# EAGLE board Buck_Regulator_AP3429A_1V8-Panel (EAGLE 9.6.2), part 1 of 6
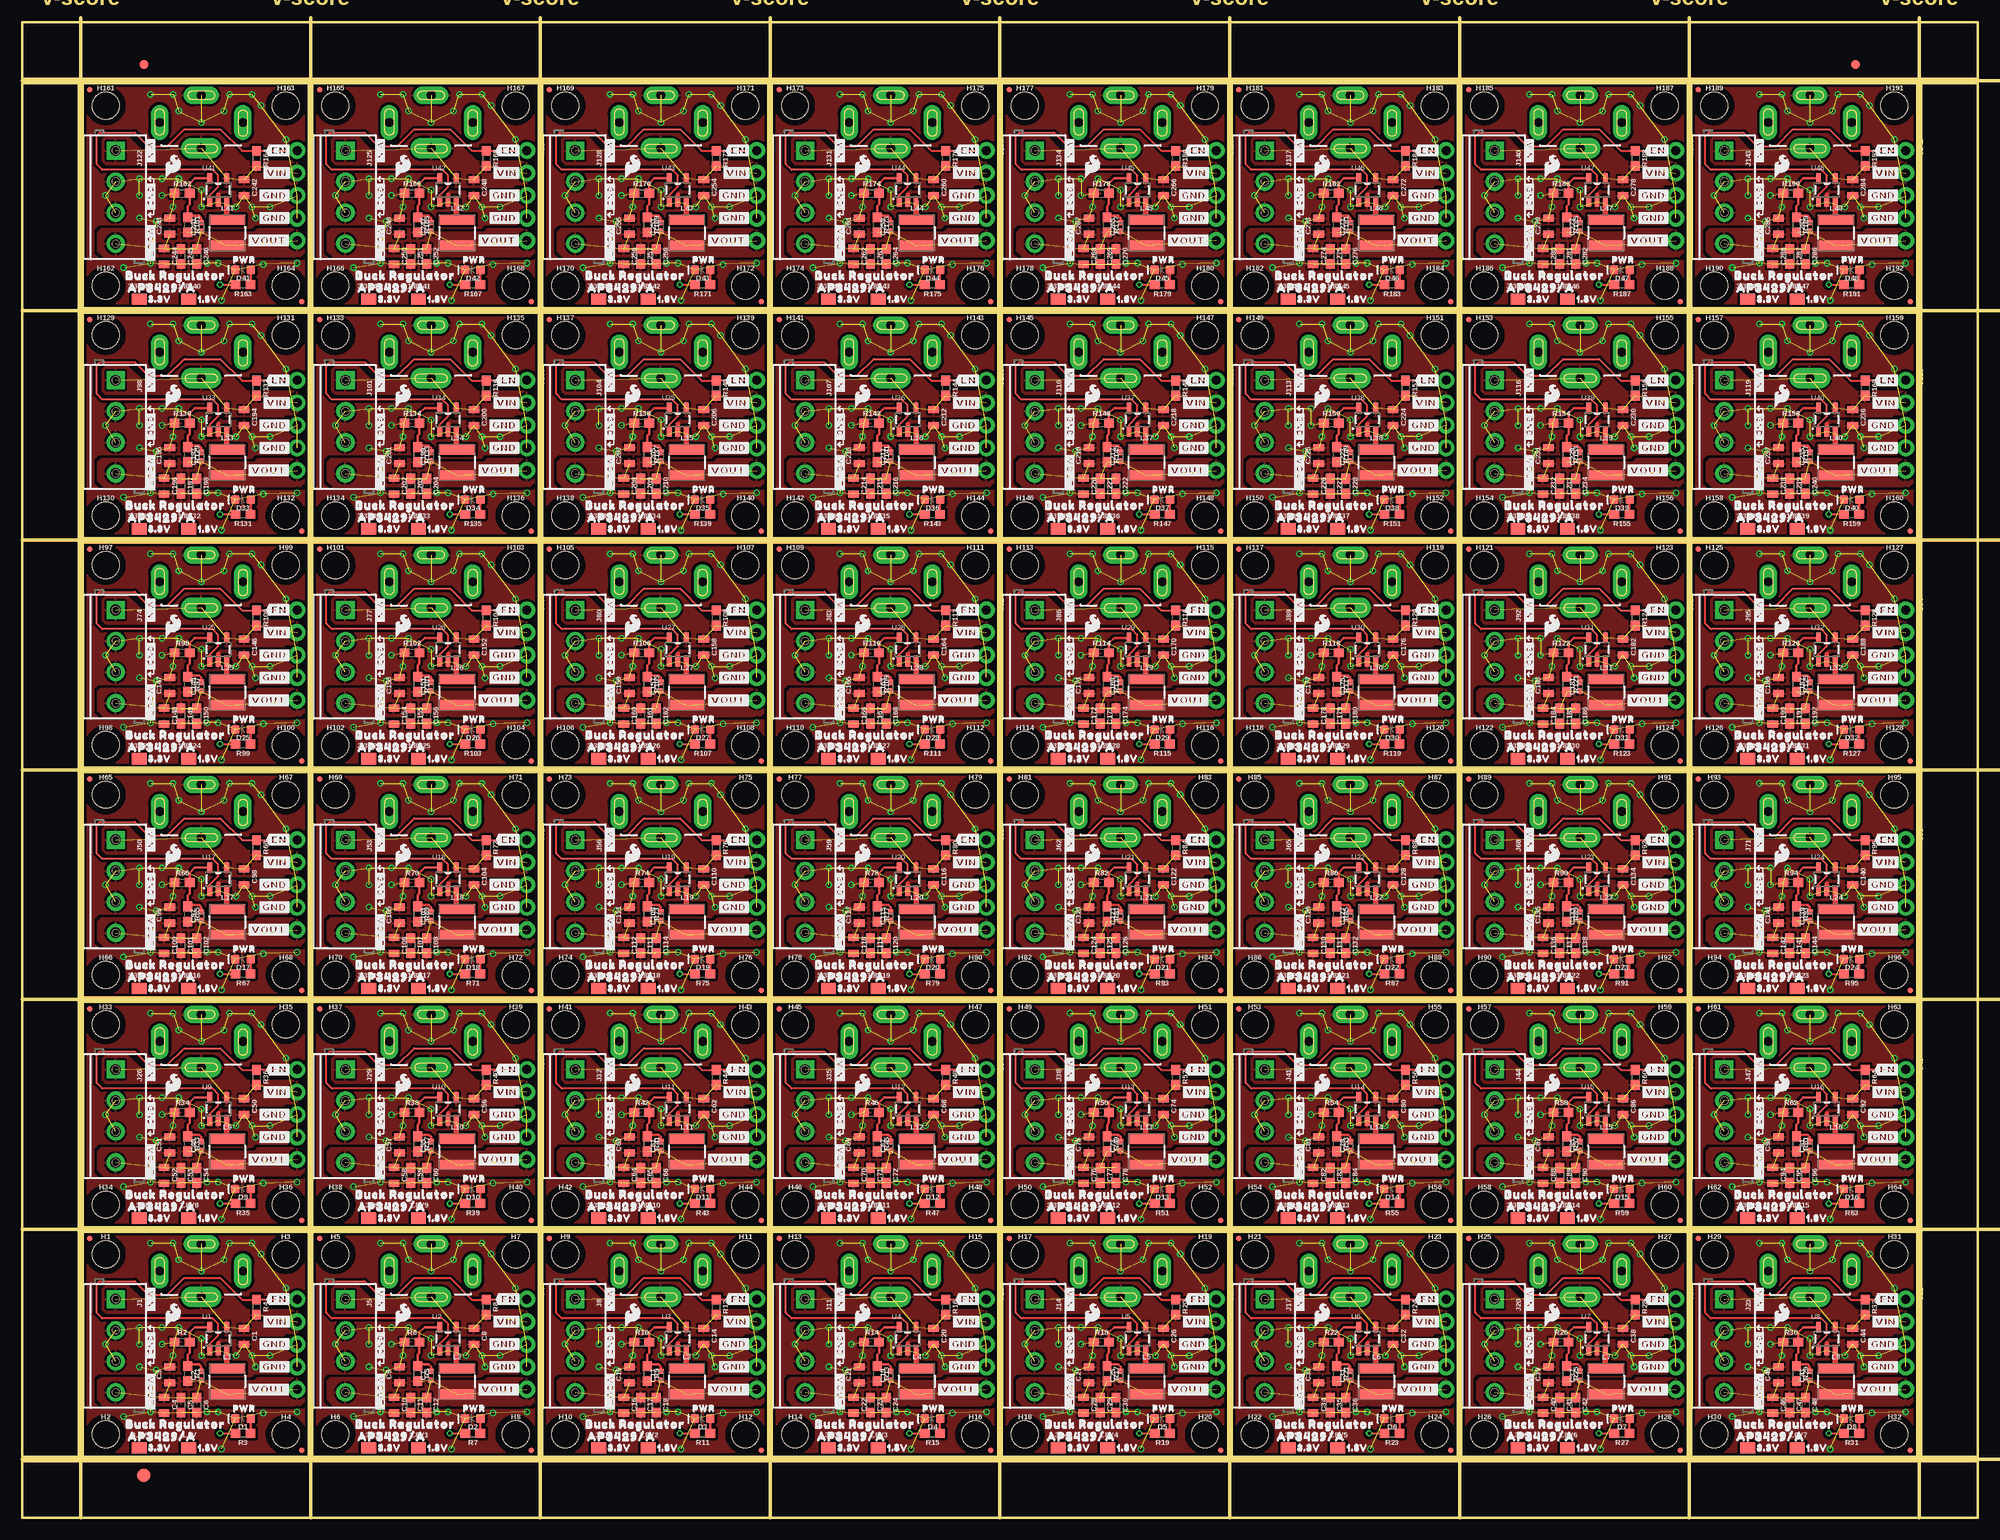
[diagram p0: board, top side]
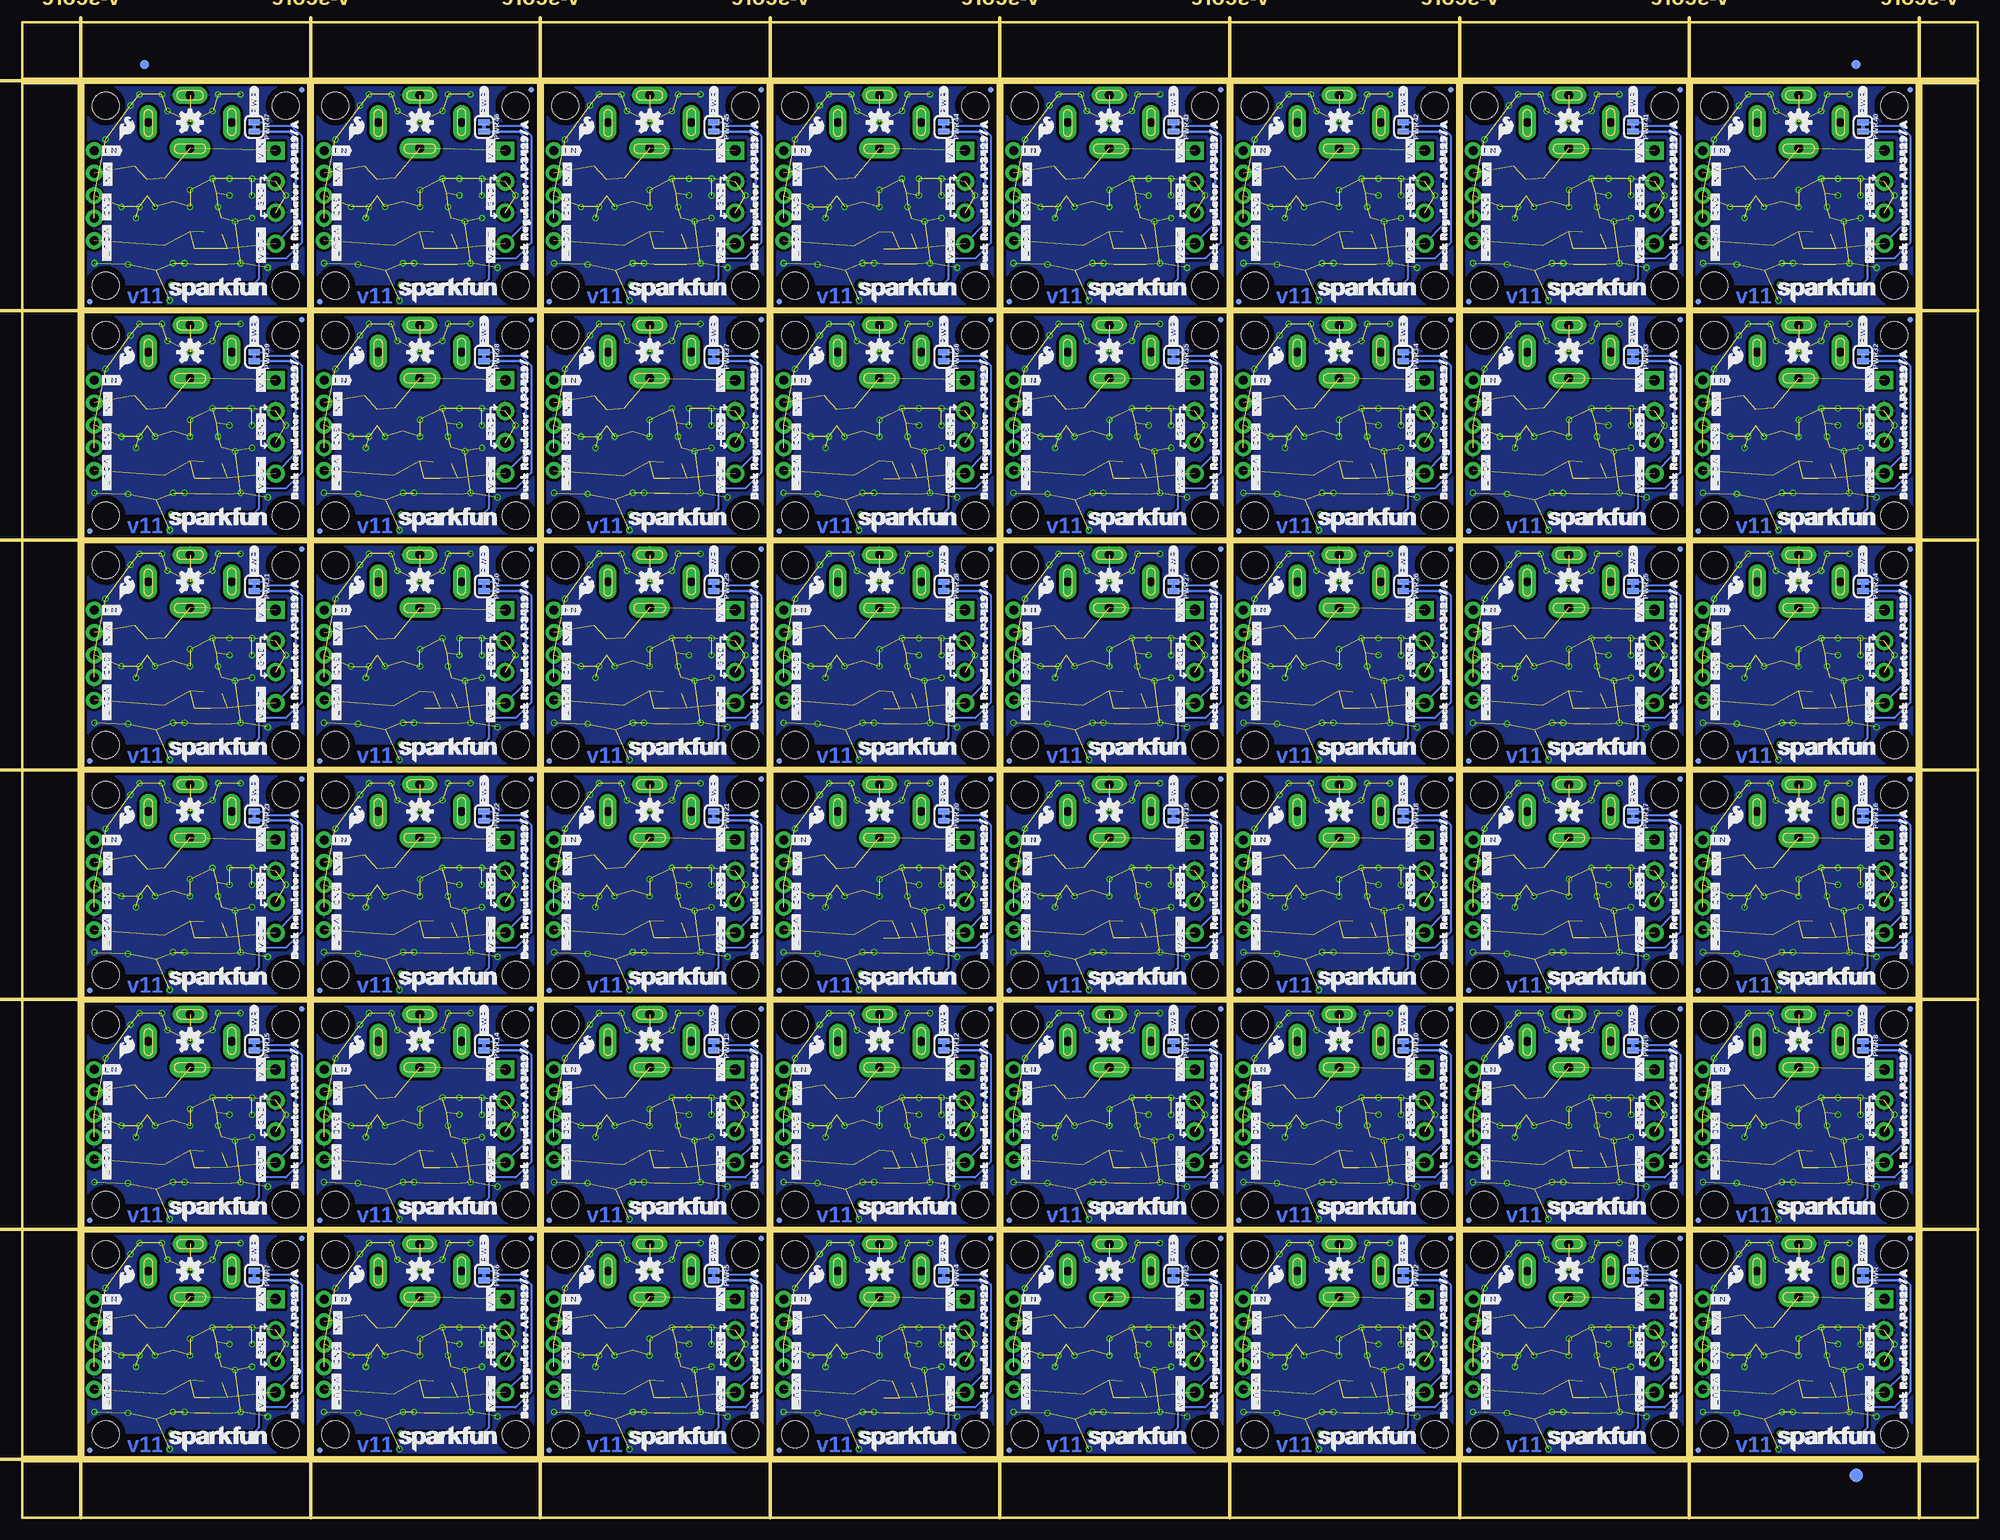
[diagram p1: board, bottom side, seen from below]

Size 220.47 x 168.66 mm. Coordinates in mm from the lower left corner, seen from the top.
Outline: 208 segments
Copper layers (1*16): Top 0.035mm / dielectric 1.5mm / Bottom 0.035mm
Design rules "Buck_Regulator_AP3429A_1V8": minimum track width 7mil, minimum drill 0.3mm, track to track 7mil, track to pad 7mil, pad to pad 7mil, via to via 7mil, smd to smd 7mil, copper to edge 7mil, drill to drill 7mil, minimum pad ring 7mil, minimum via ring 7mil, stop-mask expansion 3mil, vias tented up to drill 25mil, thermal gap 10mil
Milling: 16 lines

## Footprints (pad centres in the part's own frame; a part is rotated, then mirrored left to right if it is on the bottom)
PRODUCT_IDENT_PASTE_NO-SILK = smd 1.676 x 1.27: 1 -0.025,0
PRODUCT_IDENT_NO_NO-SILK = smd 1.676 x 1.27: 1 -0.025,0
0805 = smd 0.8 x 1.2: 1 -0.9,0; 2 0.9,0
0402-TIGHT = smd 0.6 x 0.6: 1 -0.5,0; 2 0.5,0
0603 = smd 1.1 x 1: 1 -0.85,0; 2 0.85,0
LED-0603 = smd 1 x 1: A -0.877,0; C 0.877,0
FIDUCIAL-1X2 = smd 1 x 1: 1 0,0
FIDUCIAL-1.5X3 = smd 1.5 x 1.5: 1 0,0
FIDUCIAL-MICRO = smd 0.635 x 0.635: 1 0,0
STAND-OFF-TIGHT = hole 3.048: 0,0
SCREWTERMINAL-3.5MM-4 = drill 1.2 pad 2.032 square: 1 0,0 | drill 1.2 pad 2.032: 2 3.5,0; 3 7,0; 4 10.5,0
POWER_JACK_PTH_SLOT_BOTH = drill 1 pad 2 long: GND 0,0; GNDBREAK -3.048,4.699; GNDBREAK1 -3.048,-4.699 | drill 1 pad 2.3 long: PWR -5.969,0
1X05_NO_SILK = drill 1.016 pad 1.88: 1 0,0; 2 2.54,0; 3 5.08,0; 4 7.62,0; 5 10.16,0
INDUCTOR_4X4MM = smd 4.089 x 1.143: P$1 0,1.473; P$2 0,-1.473
SMT-JUMPER_2_NC_TRACE_SILK = smd 0.66 x 1.27: 1 -0.521,0; 2 0.521,0
SOT23-5 = smd 0.55 x 1.2: 1 -0.95,-1.3; 2 0,-1.3; 3 0.95,-1.3; 4 0.95,1.3; 5 -0.95,1.3

## Placement (x,y rotation side)
1.8V  PROD_ID_PASTE_NO-SILK  [PRODUCT_IDENT_PASTE_NO-SILK]  18.8,7.87 0 top
1.8V1  PROD_ID_PASTE_NO-SILK  [PRODUCT_IDENT_PASTE_NO-SILK]  44.7,7.87 0 top
1.8V2  PROD_ID_PASTE_NO-SILK  [PRODUCT_IDENT_PASTE_NO-SILK]  70.61,7.87 0 top
1.8V3  PROD_ID_PASTE_NO-SILK  [PRODUCT_IDENT_PASTE_NO-SILK]  96.52,7.87 0 top
1.8V4  PROD_ID_PASTE_NO-SILK  [PRODUCT_IDENT_PASTE_NO-SILK]  122.43,7.87 0 top
1.8V5  PROD_ID_PASTE_NO-SILK  [PRODUCT_IDENT_PASTE_NO-SILK]  148.34,7.87 0 top
1.8V6  PROD_ID_PASTE_NO-SILK  [PRODUCT_IDENT_PASTE_NO-SILK]  174.24,7.87 0 top
1.8V7  PROD_ID_PASTE_NO-SILK  [PRODUCT_IDENT_PASTE_NO-SILK]  200.15,7.87 0 top
1.8V8  PROD_ID_PASTE_NO-SILK  [PRODUCT_IDENT_PASTE_NO-SILK]  18.8,33.78 0 top
1.8V9  PROD_ID_PASTE_NO-SILK  [PRODUCT_IDENT_PASTE_NO-SILK]  44.7,33.78 0 top
1.8V10  PROD_ID_PASTE_NO-SILK  [PRODUCT_IDENT_PASTE_NO-SILK]  70.61,33.78 0 top
1.8V11  PROD_ID_PASTE_NO-SILK  [PRODUCT_IDENT_PASTE_NO-SILK]  96.52,33.78 0 top
1.8V12  PROD_ID_PASTE_NO-SILK  [PRODUCT_IDENT_PASTE_NO-SILK]  122.43,33.78 0 top
1.8V13  PROD_ID_PASTE_NO-SILK  [PRODUCT_IDENT_PASTE_NO-SILK]  148.34,33.78 0 top
1.8V14  PROD_ID_PASTE_NO-SILK  [PRODUCT_IDENT_PASTE_NO-SILK]  174.24,33.78 0 top
1.8V15  PROD_ID_PASTE_NO-SILK  [PRODUCT_IDENT_PASTE_NO-SILK]  200.15,33.78 0 top
1.8V16  PROD_ID_PASTE_NO-SILK  [PRODUCT_IDENT_PASTE_NO-SILK]  18.8,59.69 0 top
1.8V17  PROD_ID_PASTE_NO-SILK  [PRODUCT_IDENT_PASTE_NO-SILK]  44.7,59.69 0 top
1.8V18  PROD_ID_PASTE_NO-SILK  [PRODUCT_IDENT_PASTE_NO-SILK]  70.61,59.69 0 top
1.8V19  PROD_ID_PASTE_NO-SILK  [PRODUCT_IDENT_PASTE_NO-SILK]  96.52,59.69 0 top
1.8V20  PROD_ID_PASTE_NO-SILK  [PRODUCT_IDENT_PASTE_NO-SILK]  122.43,59.69 0 top
1.8V21  PROD_ID_PASTE_NO-SILK  [PRODUCT_IDENT_PASTE_NO-SILK]  148.34,59.69 0 top
1.8V22  PROD_ID_PASTE_NO-SILK  [PRODUCT_IDENT_PASTE_NO-SILK]  174.24,59.69 0 top
1.8V23  PROD_ID_PASTE_NO-SILK  [PRODUCT_IDENT_PASTE_NO-SILK]  200.15,59.69 0 top
1.8V24  PROD_ID_PASTE_NO-SILK  [PRODUCT_IDENT_PASTE_NO-SILK]  18.8,85.6 0 top
1.8V25  PROD_ID_PASTE_NO-SILK  [PRODUCT_IDENT_PASTE_NO-SILK]  44.7,85.6 0 top
1.8V26  PROD_ID_PASTE_NO-SILK  [PRODUCT_IDENT_PASTE_NO-SILK]  70.61,85.6 0 top
1.8V27  PROD_ID_PASTE_NO-SILK  [PRODUCT_IDENT_PASTE_NO-SILK]  96.52,85.6 0 top
1.8V28  PROD_ID_PASTE_NO-SILK  [PRODUCT_IDENT_PASTE_NO-SILK]  122.43,85.6 0 top
1.8V29  PROD_ID_PASTE_NO-SILK  [PRODUCT_IDENT_PASTE_NO-SILK]  148.34,85.6 0 top
1.8V30  PROD_ID_PASTE_NO-SILK  [PRODUCT_IDENT_PASTE_NO-SILK]  174.24,85.6 0 top
1.8V31  PROD_ID_PASTE_NO-SILK  [PRODUCT_IDENT_PASTE_NO-SILK]  200.15,85.6 0 top
1.8V32  PROD_ID_PASTE_NO-SILK  [PRODUCT_IDENT_PASTE_NO-SILK]  18.8,111.51 0 top
1.8V33  PROD_ID_PASTE_NO-SILK  [PRODUCT_IDENT_PASTE_NO-SILK]  44.7,111.51 0 top
1.8V34  PROD_ID_PASTE_NO-SILK  [PRODUCT_IDENT_PASTE_NO-SILK]  70.61,111.51 0 top
1.8V35  PROD_ID_PASTE_NO-SILK  [PRODUCT_IDENT_PASTE_NO-SILK]  96.52,111.51 0 top
1.8V36  PROD_ID_PASTE_NO-SILK  [PRODUCT_IDENT_PASTE_NO-SILK]  122.43,111.51 0 top
1.8V37  PROD_ID_PASTE_NO-SILK  [PRODUCT_IDENT_PASTE_NO-SILK]  148.34,111.51 0 top
1.8V38  PROD_ID_PASTE_NO-SILK  [PRODUCT_IDENT_PASTE_NO-SILK]  174.24,111.51 0 top
1.8V39  PROD_ID_PASTE_NO-SILK  [PRODUCT_IDENT_PASTE_NO-SILK]  200.15,111.51 0 top
1.8V40  PROD_ID_PASTE_NO-SILK  [PRODUCT_IDENT_PASTE_NO-SILK]  18.8,137.41 0 top
1.8V41  PROD_ID_PASTE_NO-SILK  [PRODUCT_IDENT_PASTE_NO-SILK]  44.7,137.41 0 top
1.8V42  PROD_ID_PASTE_NO-SILK  [PRODUCT_IDENT_PASTE_NO-SILK]  70.61,137.41 0 top
1.8V43  PROD_ID_PASTE_NO-SILK  [PRODUCT_IDENT_PASTE_NO-SILK]  96.52,137.41 0 top
1.8V44  PROD_ID_PASTE_NO-SILK  [PRODUCT_IDENT_PASTE_NO-SILK]  122.43,137.41 0 top
1.8V45  PROD_ID_PASTE_NO-SILK  [PRODUCT_IDENT_PASTE_NO-SILK]  148.34,137.41 0 top
1.8V46  PROD_ID_PASTE_NO-SILK  [PRODUCT_IDENT_PASTE_NO-SILK]  174.24,137.41 0 top
1.8V47  PROD_ID_PASTE_NO-SILK  [PRODUCT_IDENT_PASTE_NO-SILK]  200.15,137.41 0 top
3.3V  PROD_ID_NO-PASTE_NO_SILK  [PRODUCT_IDENT_NO_NO-SILK]  13.21,7.87 0 top
3.3V1  PROD_ID_NO-PASTE_NO_SILK  [PRODUCT_IDENT_NO_NO-SILK]  39.12,7.87 0 top
3.3V2  PROD_ID_NO-PASTE_NO_SILK  [PRODUCT_IDENT_NO_NO-SILK]  65.02,7.87 0 top
3.3V3  PROD_ID_NO-PASTE_NO_SILK  [PRODUCT_IDENT_NO_NO-SILK]  90.93,7.87 0 top
3.3V4  PROD_ID_NO-PASTE_NO_SILK  [PRODUCT_IDENT_NO_NO-SILK]  116.84,7.87 0 top
3.3V5  PROD_ID_NO-PASTE_NO_SILK  [PRODUCT_IDENT_NO_NO-SILK]  142.75,7.87 0 top
3.3V6  PROD_ID_NO-PASTE_NO_SILK  [PRODUCT_IDENT_NO_NO-SILK]  168.66,7.87 0 top
3.3V7  PROD_ID_NO-PASTE_NO_SILK  [PRODUCT_IDENT_NO_NO-SILK]  194.56,7.87 0 top
3.3V8  PROD_ID_NO-PASTE_NO_SILK  [PRODUCT_IDENT_NO_NO-SILK]  13.21,33.78 0 top
3.3V9  PROD_ID_NO-PASTE_NO_SILK  [PRODUCT_IDENT_NO_NO-SILK]  39.12,33.78 0 top
3.3V10  PROD_ID_NO-PASTE_NO_SILK  [PRODUCT_IDENT_NO_NO-SILK]  65.02,33.78 0 top
3.3V11  PROD_ID_NO-PASTE_NO_SILK  [PRODUCT_IDENT_NO_NO-SILK]  90.93,33.78 0 top
3.3V12  PROD_ID_NO-PASTE_NO_SILK  [PRODUCT_IDENT_NO_NO-SILK]  116.84,33.78 0 top
3.3V13  PROD_ID_NO-PASTE_NO_SILK  [PRODUCT_IDENT_NO_NO-SILK]  142.75,33.78 0 top
3.3V14  PROD_ID_NO-PASTE_NO_SILK  [PRODUCT_IDENT_NO_NO-SILK]  168.66,33.78 0 top
3.3V15  PROD_ID_NO-PASTE_NO_SILK  [PRODUCT_IDENT_NO_NO-SILK]  194.56,33.78 0 top
3.3V16  PROD_ID_NO-PASTE_NO_SILK  [PRODUCT_IDENT_NO_NO-SILK]  13.21,59.69 0 top
3.3V17  PROD_ID_NO-PASTE_NO_SILK  [PRODUCT_IDENT_NO_NO-SILK]  39.12,59.69 0 top
3.3V18  PROD_ID_NO-PASTE_NO_SILK  [PRODUCT_IDENT_NO_NO-SILK]  65.02,59.69 0 top
3.3V19  PROD_ID_NO-PASTE_NO_SILK  [PRODUCT_IDENT_NO_NO-SILK]  90.93,59.69 0 top
3.3V20  PROD_ID_NO-PASTE_NO_SILK  [PRODUCT_IDENT_NO_NO-SILK]  116.84,59.69 0 top
3.3V21  PROD_ID_NO-PASTE_NO_SILK  [PRODUCT_IDENT_NO_NO-SILK]  142.75,59.69 0 top
3.3V22  PROD_ID_NO-PASTE_NO_SILK  [PRODUCT_IDENT_NO_NO-SILK]  168.66,59.69 0 top
3.3V23  PROD_ID_NO-PASTE_NO_SILK  [PRODUCT_IDENT_NO_NO-SILK]  194.56,59.69 0 top
3.3V24  PROD_ID_NO-PASTE_NO_SILK  [PRODUCT_IDENT_NO_NO-SILK]  13.21,85.6 0 top
3.3V25  PROD_ID_NO-PASTE_NO_SILK  [PRODUCT_IDENT_NO_NO-SILK]  39.12,85.6 0 top
3.3V26  PROD_ID_NO-PASTE_NO_SILK  [PRODUCT_IDENT_NO_NO-SILK]  65.02,85.6 0 top
3.3V27  PROD_ID_NO-PASTE_NO_SILK  [PRODUCT_IDENT_NO_NO-SILK]  90.93,85.6 0 top
3.3V28  PROD_ID_NO-PASTE_NO_SILK  [PRODUCT_IDENT_NO_NO-SILK]  116.84,85.6 0 top
3.3V29  PROD_ID_NO-PASTE_NO_SILK  [PRODUCT_IDENT_NO_NO-SILK]  142.75,85.6 0 top
3.3V30  PROD_ID_NO-PASTE_NO_SILK  [PRODUCT_IDENT_NO_NO-SILK]  168.66,85.6 0 top
3.3V31  PROD_ID_NO-PASTE_NO_SILK  [PRODUCT_IDENT_NO_NO-SILK]  194.56,85.6 0 top
3.3V32  PROD_ID_NO-PASTE_NO_SILK  [PRODUCT_IDENT_NO_NO-SILK]  13.21,111.51 0 top
3.3V33  PROD_ID_NO-PASTE_NO_SILK  [PRODUCT_IDENT_NO_NO-SILK]  39.12,111.51 0 top
3.3V34  PROD_ID_NO-PASTE_NO_SILK  [PRODUCT_IDENT_NO_NO-SILK]  65.02,111.51 0 top
3.3V35  PROD_ID_NO-PASTE_NO_SILK  [PRODUCT_IDENT_NO_NO-SILK]  90.93,111.51 0 top
3.3V36  PROD_ID_NO-PASTE_NO_SILK  [PRODUCT_IDENT_NO_NO-SILK]  116.84,111.51 0 top
3.3V37  PROD_ID_NO-PASTE_NO_SILK  [PRODUCT_IDENT_NO_NO-SILK]  142.75,111.51 0 top
3.3V38  PROD_ID_NO-PASTE_NO_SILK  [PRODUCT_IDENT_NO_NO-SILK]  168.66,111.51 0 top
3.3V39  PROD_ID_NO-PASTE_NO_SILK  [PRODUCT_IDENT_NO_NO-SILK]  194.56,111.51 0 top
3.3V40  PROD_ID_NO-PASTE_NO_SILK  [PRODUCT_IDENT_NO_NO-SILK]  13.21,137.41 0 top
3.3V41  PROD_ID_NO-PASTE_NO_SILK  [PRODUCT_IDENT_NO_NO-SILK]  39.12,137.41 0 top
3.3V42  PROD_ID_NO-PASTE_NO_SILK  [PRODUCT_IDENT_NO_NO-SILK]  65.02,137.41 0 top
3.3V43  PROD_ID_NO-PASTE_NO_SILK  [PRODUCT_IDENT_NO_NO-SILK]  90.93,137.41 0 top
3.3V44  PROD_ID_NO-PASTE_NO_SILK  [PRODUCT_IDENT_NO_NO-SILK]  116.84,137.41 0 top
3.3V45  PROD_ID_NO-PASTE_NO_SILK  [PRODUCT_IDENT_NO_NO-SILK]  142.75,137.41 0 top
3.3V46  PROD_ID_NO-PASTE_NO_SILK  [PRODUCT_IDENT_NO_NO-SILK]  168.66,137.41 0 top
3.3V47  PROD_ID_NO-PASTE_NO_SILK  [PRODUCT_IDENT_NO_NO-SILK]  194.56,137.41 0 top
C1  22uF  [0805]  25.02,20.45 270 top
C2  22pF  [0402-TIGHT]  20.19,16 90 top
C3  22uF  [0805]  16.64,16.13 90 top
C4  22uF  [0805]  16,12.7 270 top
C5  0.1uF  [0603]  17.91,12.7 270 top
C6  1.0uF  [0603]  19.68,12.7 270 top
C7  22pF  [0402-TIGHT]  46.1,16 90 top
C8  22uF  [0805]  50.93,20.45 270 top
C9  22uF  [0805]  42.54,16.13 90 top
C10  22uF  [0805]  41.91,12.7 270 top
C11  0.1uF  [0603]  43.81,12.7 270 top
C12  1.0uF  [0603]  45.59,12.7 270 top
C13  22pF  [0402-TIGHT]  72.01,16 90 top
C14  22uF  [0805]  76.84,20.45 270 top
C15  22uF  [0805]  68.45,16.13 90 top
C16  22uF  [0805]  67.82,12.7 270 top
C17  0.1uF  [0603]  69.72,12.7 270 top
C18  1.0uF  [0603]  71.5,12.7 270 top
C19  22pF  [0402-TIGHT]  97.92,16 90 top
C20  22uF  [0805]  102.74,20.45 270 top
C21  22uF  [0805]  94.36,16.13 90 top
C22  22uF  [0805]  93.73,12.7 270 top
C23  0.1uF  [0603]  95.63,12.7 270 top
C24  1.0uF  [0603]  97.41,12.7 270 top
C25  22pF  [0402-TIGHT]  123.83,16 90 top
C26  22uF  [0805]  128.65,20.45 270 top
C27  22uF  [0805]  120.27,16.13 90 top
C28  22uF  [0805]  119.63,12.7 270 top
C29  0.1uF  [0603]  121.54,12.7 270 top
C30  1.0uF  [0603]  123.32,12.7 270 top
C31  22pF  [0402-TIGHT]  149.73,16 90 top
C32  22uF  [0805]  154.56,20.45 270 top
C33  22uF  [0805]  146.18,16.13 90 top
C34  22uF  [0805]  145.54,12.7 270 top
C35  0.1uF  [0603]  147.45,12.7 270 top
C36  1.0uF  [0603]  149.22,12.7 270 top
C37  22pF  [0402-TIGHT]  175.64,16 90 top
C38  22uF  [0805]  180.47,20.45 270 top
C39  22uF  [0805]  172.09,16.13 90 top
C40  22uF  [0805]  171.45,12.7 270 top
C41  0.1uF  [0603]  173.36,12.7 270 top
C42  1.0uF  [0603]  175.13,12.7 270 top
C43  22pF  [0402-TIGHT]  201.55,16 90 top
C44  22uF  [0805]  206.38,20.45 270 top
C45  22uF  [0805]  197.99,16.13 90 top
C46  22uF  [0805]  197.36,12.7 270 top
C47  0.1uF  [0603]  199.26,12.7 270 top
C48  1.0uF  [0603]  201.04,12.7 270 top
C49  22pF  [0402-TIGHT]  20.19,41.91 90 top
C50  22uF  [0805]  25.02,46.35 270 top
C51  22uF  [0805]  16.64,42.04 90 top
C52  22uF  [0805]  16,38.61 270 top
C53  0.1uF  [0603]  17.91,38.61 270 top
C54  1.0uF  [0603]  19.68,38.61 270 top
C55  22pF  [0402-TIGHT]  46.1,41.91 90 top
C56  22uF  [0805]  50.93,46.35 270 top
C57  22uF  [0805]  42.54,42.04 90 top
C58  22uF  [0805]  41.91,38.61 270 top
C59  0.1uF  [0603]  43.81,38.61 270 top
C60  1.0uF  [0603]  45.59,38.61 270 top
C61  22pF  [0402-TIGHT]  72.01,41.91 90 top
C62  22uF  [0805]  76.84,46.35 270 top
C63  22uF  [0805]  68.45,42.04 90 top
C64  22uF  [0805]  67.82,38.61 270 top
C65  0.1uF  [0603]  69.72,38.61 270 top
C66  1.0uF  [0603]  71.5,38.61 270 top
C67  22pF  [0402-TIGHT]  97.92,41.91 90 top
C68  22uF  [0805]  102.74,46.35 270 top
C69  22uF  [0805]  94.36,42.04 90 top
C70  22uF  [0805]  93.73,38.61 270 top
C71  0.1uF  [0603]  95.63,38.61 270 top
C72  1.0uF  [0603]  97.41,38.61 270 top
C73  22pF  [0402-TIGHT]  123.83,41.91 90 top
C74  22uF  [0805]  128.65,46.35 270 top
C75  22uF  [0805]  120.27,42.04 90 top
C76  22uF  [0805]  119.63,38.61 270 top
C77  0.1uF  [0603]  121.54,38.61 270 top
C78  1.0uF  [0603]  123.32,38.61 270 top
C79  22pF  [0402-TIGHT]  149.73,41.91 90 top
C80  22uF  [0805]  154.56,46.35 270 top
C81  22uF  [0805]  146.18,42.04 90 top
C82  22uF  [0805]  145.54,38.61 270 top
C83  0.1uF  [0603]  147.45,38.61 270 top
C84  1.0uF  [0603]  149.22,38.61 270 top
C85  22pF  [0402-TIGHT]  175.64,41.91 90 top
C86  22uF  [0805]  180.47,46.35 270 top
C87  22uF  [0805]  172.09,42.04 90 top
C88  22uF  [0805]  171.45,38.61 270 top
C89  0.1uF  [0603]  173.36,38.61 270 top
C90  1.0uF  [0603]  175.13,38.61 270 top
C91  22pF  [0402-TIGHT]  201.55,41.91 90 top
C92  22uF  [0805]  206.38,46.35 270 top
C93  22uF  [0805]  197.99,42.04 90 top
C94  22uF  [0805]  197.36,38.61 270 top
C95  0.1uF  [0603]  199.26,38.61 270 top
C96  1.0uF  [0603]  201.04,38.61 270 top
C97  22pF  [0402-TIGHT]  20.19,67.82 90 top
C98  22uF  [0805]  25.02,72.26 270 top
C99  22uF  [0805]  16.64,67.95 90 top
C100  22uF  [0805]  16,64.52 270 top
C101  0.1uF  [0603]  17.91,64.52 270 top
C102  1.0uF  [0603]  19.68,64.52 270 top
C103  22pF  [0402-TIGHT]  46.1,67.82 90 top
C104  22uF  [0805]  50.93,72.26 270 top
C105  22uF  [0805]  42.54,67.95 90 top
C106  22uF  [0805]  41.91,64.52 270 top
C107  0.1uF  [0603]  43.81,64.52 270 top
C108  1.0uF  [0603]  45.59,64.52 270 top
C109  22pF  [0402-TIGHT]  72.01,67.82 90 top
C110  22uF  [0805]  76.84,72.26 270 top
C111  22uF  [0805]  68.45,67.95 90 top
C112  22uF  [0805]  67.82,64.52 270 top
C113  0.1uF  [0603]  69.72,64.52 270 top
C114  1.0uF  [0603]  71.5,64.52 270 top
C115  22pF  [0402-TIGHT]  97.92,67.82 90 top
C116  22uF  [0805]  102.74,72.26 270 top
C117  22uF  [0805]  94.36,67.95 90 top
C118  22uF  [0805]  93.73,64.52 270 top
C119  0.1uF  [0603]  95.63,64.52 270 top
C120  1.0uF  [0603]  97.41,64.52 270 top
C121  22pF  [0402-TIGHT]  123.83,67.82 90 top
C122  22uF  [0805]  128.65,72.26 270 top
C123  22uF  [0805]  120.27,67.95 90 top
C124  22uF  [0805]  119.63,64.52 270 top
C125  0.1uF  [0603]  121.54,64.52 270 top
C126  1.0uF  [0603]  123.32,64.52 270 top
C127  22pF  [0402-TIGHT]  149.73,67.82 90 top
C128  22uF  [0805]  154.56,72.26 270 top
C129  22uF  [0805]  146.18,67.95 90 top
C130  22uF  [0805]  145.54,64.52 270 top
C131  0.1uF  [0603]  147.45,64.52 270 top
C132  1.0uF  [0603]  149.22,64.52 270 top
C133  22pF  [0402-TIGHT]  175.64,67.82 90 top
C134  22uF  [0805]  180.47,72.26 270 top
C135  22uF  [0805]  172.09,67.95 90 top
C136  22uF  [0805]  171.45,64.52 270 top
C137  0.1uF  [0603]  173.36,64.52 270 top
C138  1.0uF  [0603]  175.13,64.52 270 top
C139  22pF  [0402-TIGHT]  201.55,67.82 90 top
C140  22uF  [0805]  206.38,72.26 270 top
C141  22uF  [0805]  197.99,67.95 90 top
C142  22uF  [0805]  197.36,64.52 270 top
C143  0.1uF  [0603]  199.26,64.52 270 top
C144  1.0uF  [0603]  201.04,64.52 270 top
C145  22pF  [0402-TIGHT]  20.19,93.73 90 top
C146  22uF  [0805]  25.02,98.17 270 top
C147  22uF  [0805]  16.64,93.85 90 top
C148  22uF  [0805]  16,90.42 270 top
C149  0.1uF  [0603]  17.91,90.42 270 top
C150  1.0uF  [0603]  19.68,90.42 270 top
C151  22pF  [0402-TIGHT]  46.1,93.73 90 top
C152  22uF  [0805]  50.93,98.17 270 top
C153  22uF  [0805]  42.54,93.85 90 top
C154  22uF  [0805]  41.91,90.42 270 top
C155  0.1uF  [0603]  43.81,90.42 270 top
C156  1.0uF  [0603]  45.59,90.42 270 top
C157  22pF  [0402-TIGHT]  72.01,93.73 90 top
C158  22uF  [0805]  76.84,98.17 270 top
C159  22uF  [0805]  68.45,93.85 90 top
C160  22uF  [0805]  67.82,90.42 270 top
C161  0.1uF  [0603]  69.72,90.42 270 top
C162  1.0uF  [0603]  71.5,90.42 270 top
C163  22pF  [0402-TIGHT]  97.92,93.73 90 top
C164  22uF  [0805]  102.74,98.17 270 top
C165  22uF  [0805]  94.36,93.85 90 top
C166  22uF  [0805]  93.73,90.42 270 top
C167  0.1uF  [0603]  95.63,90.42 270 top
C168  1.0uF  [0603]  97.41,90.42 270 top
C169  22pF  [0402-TIGHT]  123.83,93.73 90 top
C170  22uF  [0805]  128.65,98.17 270 top
C171  22uF  [0805]  120.27,93.85 90 top
C172  22uF  [0805]  119.63,90.42 270 top
C173  0.1uF  [0603]  121.54,90.42 270 top
C174  1.0uF  [0603]  123.32,90.42 270 top
C175  22pF  [0402-TIGHT]  149.73,93.73 90 top
C176  22uF  [0805]  154.56,98.17 270 top
C177  22uF  [0805]  146.18,93.85 90 top
C178  22uF  [0805]  145.54,90.42 270 top
C179  0.1uF  [0603]  147.45,90.42 270 top
C180  1.0uF  [0603]  149.22,90.42 270 top
C181  22pF  [0402-TIGHT]  175.64,93.73 90 top
C182  22uF  [0805]  180.47,98.17 270 top
C183  22uF  [0805]  172.09,93.85 90 top
C184  22uF  [0805]  171.45,90.42 270 top
C185  0.1uF  [0603]  173.36,90.42 270 top
C186  1.0uF  [0603]  175.13,90.42 270 top
C187  22pF  [0402-TIGHT]  201.55,93.73 90 top
C188  22uF  [0805]  206.38,98.17 270 top
C189  22uF  [0805]  197.99,93.85 90 top
C190  22uF  [0805]  197.36,90.42 270 top
C191  0.1uF  [0603]  199.26,90.42 270 top
C192  1.0uF  [0603]  201.04,90.42 270 top
C193  22pF  [0402-TIGHT]  20.19,119.63 90 top
C194  22uF  [0805]  25.02,124.08 270 top
C195  22uF  [0805]  16.64,119.76 90 top
C196  22uF  [0805]  16,116.33 270 top
C197  0.1uF  [0603]  17.91,116.33 270 top
C198  1.0uF  [0603]  19.68,116.33 270 top
C199  22pF  [0402-TIGHT]  46.1,119.63 90 top
C200  22uF  [0805]  50.93,124.08 270 top
C201  22uF  [0805]  42.54,119.76 90 top
C202  22uF  [0805]  41.91,116.33 270 top
C203  0.1uF  [0603]  43.81,116.33 270 top
C204  1.0uF  [0603]  45.59,116.33 270 top
C205  22pF  [0402-TIGHT]  72.01,119.63 90 top
C206  22uF  [0805]  76.84,124.08 270 top
C207  22uF  [0805]  68.45,119.76 90 top
C208  22uF  [0805]  67.82,116.33 270 top
C209  0.1uF  [0603]  69.72,116.33 270 top
C210  1.0uF  [0603]  71.5,116.33 270 top
C211  22pF  [0402-TIGHT]  97.92,119.63 90 top
C212  22uF  [0805]  102.74,124.08 270 top
C213  22uF  [0805]  94.36,119.76 90 top
C214  22uF  [0805]  93.73,116.33 270 top
C215  0.1uF  [0603]  95.63,116.33 270 top
C216  1.0uF  [0603]  97.41,116.33 270 top
C217  22pF  [0402-TIGHT]  123.83,119.63 90 top
C218  22uF  [0805]  128.65,124.08 270 top
C219  22uF  [0805]  120.27,119.76 90 top
C220  22uF  [0805]  119.63,116.33 270 top
C221  0.1uF  [0603]  121.54,116.33 270 top
C222  1.0uF  [0603]  123.32,116.33 270 top
C223  22pF  [0402-TIGHT]  149.73,119.63 90 top
C224  22uF  [0805]  154.56,124.08 270 top
C225  22uF  [0805]  146.18,119.76 90 top
C226  22uF  [0805]  145.54,116.33 270 top
C227  0.1uF  [0603]  147.45,116.33 270 top
C228  1.0uF  [0603]  149.22,116.33 270 top
C229  22pF  [0402-TIGHT]  175.64,119.63 90 top
C230  22uF  [0805]  180.47,124.08 270 top
C231  22uF  [0805]  172.09,119.76 90 top
C232  22uF  [0805]  171.45,116.33 270 top
C233  0.1uF  [0603]  173.36,116.33 270 top
C234  1.0uF  [0603]  175.13,116.33 270 top
C235  22pF  [0402-TIGHT]  201.55,119.63 90 top
C236  22uF  [0805]  206.38,124.08 270 top
C237  22uF  [0805]  197.99,119.76 90 top
C238  22uF  [0805]  197.36,116.33 270 top
C239  0.1uF  [0603]  199.26,116.33 270 top
C240  1.0uF  [0603]  201.04,116.33 270 top
C241  22pF  [0402-TIGHT]  20.19,145.54 90 top
C242  22uF  [0805]  25.02,149.99 270 top
C243  22uF  [0805]  16.64,145.67 90 top
C244  22uF  [0805]  16,142.24 270 top
C245  0.1uF  [0603]  17.91,142.24 270 top
C246  1.0uF  [0603]  19.68,142.24 270 top
C247  22pF  [0402-TIGHT]  46.1,145.54 90 top
C248  22uF  [0805]  50.93,149.99 270 top
C249  22uF  [0805]  42.54,145.67 90 top
C250  22uF  [0805]  41.91,142.24 270 top
C251  0.1uF  [0603]  43.81,142.24 270 top
C252  1.0uF  [0603]  45.59,142.24 270 top
C253  22pF  [0402-TIGHT]  72.01,145.54 90 top
C254  22uF  [0805]  76.84,149.99 270 top
C255  22uF  [0805]  68.45,145.67 90 top
C256  22uF  [0805]  67.82,142.24 270 top
C257  0.1uF  [0603]  69.72,142.24 270 top
C258  1.0uF  [0603]  71.5,142.24 270 top
C259  22pF  [0402-TIGHT]  97.92,145.54 90 top
C260  22uF  [0805]  102.74,149.99 270 top
C261  22uF  [0805]  94.36,145.67 90 top
C262  22uF  [0805]  93.73,142.24 270 top
C263  0.1uF  [0603]  95.63,142.24 270 top
C264  1.0uF  [0603]  97.41,142.24 270 top
C265  22pF  [0402-TIGHT]  123.83,145.54 90 top
C266  22uF  [0805]  128.65,149.99 270 top
C267  22uF  [0805]  120.27,145.67 90 top
C268  22uF  [0805]  119.63,142.24 270 top
C269  0.1uF  [0603]  121.54,142.24 270 top
C270  1.0uF  [0603]  123.32,142.24 270 top
C271  22pF  [0402-TIGHT]  149.73,145.54 90 top
C272  22uF  [0805]  154.56,149.99 270 top
C273  22uF  [0805]  146.18,145.67 90 top
C274  22uF  [0805]  145.54,142.24 270 top
C275  0.1uF  [0603]  147.45,142.24 270 top
C276  1.0uF  [0603]  149.22,142.24 270 top
C277  22pF  [0402-TIGHT]  175.64,145.54 90 top
C278  22uF  [0805]  180.47,149.99 270 top
C279  22uF  [0805]  172.09,145.67 90 top
C280  22uF  [0805]  171.45,142.24 270 top
C281  0.1uF  [0603]  173.36,142.24 270 top
C282  1.0uF  [0603]  175.13,142.24 270 top
C283  22pF  [0402-TIGHT]  201.55,145.54 90 top
C284  22uF  [0805]  206.38,149.99 270 top
C285  22uF  [0805]  197.99,145.67 90 top
C286  22uF  [0805]  197.36,142.24 270 top
C287  0.1uF  [0603]  199.26,142.24 270 top
C288  1.0uF  [0603]  201.04,142.24 270 top
D1  RED  [LED-0603]  24.89,11.18 180 top
D2  RED  [LED-0603]  50.8,11.18 180 top
D3  RED  [LED-0603]  76.71,11.18 180 top
D4  RED  [LED-0603]  102.62,11.18 180 top
D5  RED  [LED-0603]  128.52,11.18 180 top
D6  RED  [LED-0603]  154.43,11.18 180 top
D7  RED  [LED-0603]  180.34,11.18 180 top
D8  RED  [LED-0603]  206.25,11.18 180 top
D9  RED  [LED-0603]  24.89,37.08 180 top
D10  RED  [LED-0603]  50.8,37.08 180 top
D11  RED  [LED-0603]  76.71,37.08 180 top
D12  RED  [LED-0603]  102.62,37.08 180 top
D13  RED  [LED-0603]  128.52,37.08 180 top
D14  RED  [LED-0603]  154.43,37.08 180 top
D15  RED  [LED-0603]  180.34,37.08 180 top
D16  RED  [LED-0603]  206.25,37.08 180 top
D17  RED  [LED-0603]  24.89,62.99 180 top
D18  RED  [LED-0603]  50.8,62.99 180 top
D19  RED  [LED-0603]  76.71,62.99 180 top
D20  RED  [LED-0603]  102.62,62.99 180 top
D21  RED  [LED-0603]  128.52,62.99 180 top
D22  RED  [LED-0603]  154.43,62.99 180 top
D23  RED  [LED-0603]  180.34,62.99 180 top
D24  RED  [LED-0603]  206.25,62.99 180 top
D25  RED  [LED-0603]  24.89,88.9 180 top
D26  RED  [LED-0603]  50.8,88.9 180 top
D27  RED  [LED-0603]  76.71,88.9 180 top
D28  RED  [LED-0603]  102.62,88.9 180 top
D29  RED  [LED-0603]  128.52,88.9 180 top
D30  RED  [LED-0603]  154.43,88.9 180 top
D31  RED  [LED-0603]  180.34,88.9 180 top
D32  RED  [LED-0603]  206.25,88.9 180 top
D33  RED  [LED-0603]  24.89,114.81 180 top
D34  RED  [LED-0603]  50.8,114.81 180 top
D35  RED  [LED-0603]  76.71,114.81 180 top
D36  RED  [LED-0603]  102.62,114.81 180 top
D37  RED  [LED-0603]  128.52,114.81 180 top
D38  RED  [LED-0603]  154.43,114.81 180 top
D39  RED  [LED-0603]  180.34,114.81 180 top
D40  RED  [LED-0603]  206.25,114.81 180 top
D41  RED  [LED-0603]  24.89,140.72 180 top
D42  RED  [LED-0603]  50.8,140.72 180 top
D43  RED  [LED-0603]  76.71,140.72 180 top
D44  RED  [LED-0603]  102.62,140.72 180 top
D45  RED  [LED-0603]  128.52,140.72 180 top
D46  RED  [LED-0603]  154.43,140.72 180 top
D47  RED  [LED-0603]  180.34,140.72 180 top
D48  RED  [LED-0603]  206.25,140.72 180 top
E$1  [FIDUCIAL-1X2]  13.72,163.89 0 top
E$2  [FIDUCIAL-1X2]  13.72,163.89 0 bottom
E$3  [FIDUCIAL-1X2]  206.69,163.89 0 top
E$4  [FIDUCIAL-1X2]  206.69,163.89 0 bottom
E$5  [FIDUCIAL-1.5X3]  13.72,4.76 0 top
E$6  [FIDUCIAL-1.5X3]  13.72,4.76 0 bottom
FD1  FIDUCIALUFIDUCIAL  [FIDUCIAL-MICRO]  31.5,7.62 0 bottom
FD2  FIDUCIALUFIDUCIAL  [FIDUCIAL-MICRO]  31.5,7.62 0 top
FD3  FIDUCIALUFIDUCIAL  [FIDUCIAL-MICRO]  7.62,31.5 0 bottom
FD4  FIDUCIALUFIDUCIAL  [FIDUCIAL-MICRO]  7.62,31.5 0 top
FD5  FIDUCIALUFIDUCIAL  [FIDUCIAL-MICRO]  57.4,7.62 0 bottom
FD6  FIDUCIALUFIDUCIAL  [FIDUCIAL-MICRO]  57.4,7.62 0 top
FD7  FIDUCIALUFIDUCIAL  [FIDUCIAL-MICRO]  33.53,31.5 0 bottom
FD8  FIDUCIALUFIDUCIAL  [FIDUCIAL-MICRO]  33.53,31.5 0 top
FD9  FIDUCIALUFIDUCIAL  [FIDUCIAL-MICRO]  83.31,7.62 0 bottom
FD10  FIDUCIALUFIDUCIAL  [FIDUCIAL-MICRO]  83.31,7.62 0 top
FD11  FIDUCIALUFIDUCIAL  [FIDUCIAL-MICRO]  59.44,31.5 0 bottom
FD12  FIDUCIALUFIDUCIAL  [FIDUCIAL-MICRO]  59.44,31.5 0 top
FD13  FIDUCIALUFIDUCIAL  [FIDUCIAL-MICRO]  109.22,7.62 0 bottom
FD14  FIDUCIALUFIDUCIAL  [FIDUCIAL-MICRO]  109.22,7.62 0 top
FD15  FIDUCIALUFIDUCIAL  [FIDUCIAL-MICRO]  85.34,31.5 0 bottom
FD16  FIDUCIALUFIDUCIAL  [FIDUCIAL-MICRO]  85.34,31.5 0 top
FD17  FIDUCIALUFIDUCIAL  [FIDUCIAL-MICRO]  135.13,7.62 0 bottom
FD18  FIDUCIALUFIDUCIAL  [FIDUCIAL-MICRO]  135.13,7.62 0 top
FD19  FIDUCIALUFIDUCIAL  [FIDUCIAL-MICRO]  111.25,31.5 0 bottom
FD20  FIDUCIALUFIDUCIAL  [FIDUCIAL-MICRO]  111.25,31.5 0 top
FD21  FIDUCIALUFIDUCIAL  [FIDUCIAL-MICRO]  161.04,7.62 0 bottom
FD22  FIDUCIALUFIDUCIAL  [FIDUCIAL-MICRO]  161.04,7.62 0 top
FD23  FIDUCIALUFIDUCIAL  [FIDUCIAL-MICRO]  137.16,31.5 0 bottom
FD24  FIDUCIALUFIDUCIAL  [FIDUCIAL-MICRO]  137.16,31.5 0 top
FD25  FIDUCIALUFIDUCIAL  [FIDUCIAL-MICRO]  186.94,7.62 0 bottom
FD26  FIDUCIALUFIDUCIAL  [FIDUCIAL-MICRO]  186.94,7.62 0 top
FD27  FIDUCIALUFIDUCIAL  [FIDUCIAL-MICRO]  163.07,31.5 0 bottom
FD28  FIDUCIALUFIDUCIAL  [FIDUCIAL-MICRO]  163.07,31.5 0 top
FD29  FIDUCIALUFIDUCIAL  [FIDUCIAL-MICRO]  212.85,7.62 0 bottom
FD30  FIDUCIALUFIDUCIAL  [FIDUCIAL-MICRO]  212.85,7.62 0 top
FD31  FIDUCIALUFIDUCIAL  [FIDUCIAL-MICRO]  188.98,31.5 0 bottom
FD32  FIDUCIALUFIDUCIAL  [FIDUCIAL-MICRO]  188.98,31.5 0 top
FD33  FIDUCIALUFIDUCIAL  [FIDUCIAL-MICRO]  31.5,33.53 0 bottom
FD34  FIDUCIALUFIDUCIAL  [FIDUCIAL-MICRO]  31.5,33.53 0 top
FD35  FIDUCIALUFIDUCIAL  [FIDUCIAL-MICRO]  7.62,57.4 0 bottom
FD36  FIDUCIALUFIDUCIAL  [FIDUCIAL-MICRO]  7.62,57.4 0 top
FD37  FIDUCIALUFIDUCIAL  [FIDUCIAL-MICRO]  57.4,33.53 0 bottom
FD38  FIDUCIALUFIDUCIAL  [FIDUCIAL-MICRO]  57.4,33.53 0 top
FD39  FIDUCIALUFIDUCIAL  [FIDUCIAL-MICRO]  33.53,57.4 0 bottom
FD40  FIDUCIALUFIDUCIAL  [FIDUCIAL-MICRO]  33.53,57.4 0 top
FD41  FIDUCIALUFIDUCIAL  [FIDUCIAL-MICRO]  83.31,33.53 0 bottom
FD42  FIDUCIALUFIDUCIAL  [FIDUCIAL-MICRO]  83.31,33.53 0 top
FD43  FIDUCIALUFIDUCIAL  [FIDUCIAL-MICRO]  59.44,57.4 0 bottom
FD44  FIDUCIALUFIDUCIAL  [FIDUCIAL-MICRO]  59.44,57.4 0 top
FD45  FIDUCIALUFIDUCIAL  [FIDUCIAL-MICRO]  109.22,33.53 0 bottom
FD46  FIDUCIALUFIDUCIAL  [FIDUCIAL-MICRO]  109.22,33.53 0 top
FD47  FIDUCIALUFIDUCIAL  [FIDUCIAL-MICRO]  85.34,57.4 0 bottom
FD48  FIDUCIALUFIDUCIAL  [FIDUCIAL-MICRO]  85.34,57.4 0 top
FD49  FIDUCIALUFIDUCIAL  [FIDUCIAL-MICRO]  135.13,33.53 0 bottom
FD50  FIDUCIALUFIDUCIAL  [FIDUCIAL-MICRO]  135.13,33.53 0 top
FD51  FIDUCIALUFIDUCIAL  [FIDUCIAL-MICRO]  111.25,57.4 0 bottom
FD52  FIDUCIALUFIDUCIAL  [FIDUCIAL-MICRO]  111.25,57.4 0 top
FD53  FIDUCIALUFIDUCIAL  [FIDUCIAL-MICRO]  161.04,33.53 0 bottom
FD54  FIDUCIALUFIDUCIAL  [FIDUCIAL-MICRO]  161.04,33.53 0 top
FD55  FIDUCIALUFIDUCIAL  [FIDUCIAL-MICRO]  137.16,57.4 0 bottom
FD56  FIDUCIALUFIDUCIAL  [FIDUCIAL-MICRO]  137.16,57.4 0 top
FD57  FIDUCIALUFIDUCIAL  [FIDUCIAL-MICRO]  186.94,33.53 0 bottom
FD58  FIDUCIALUFIDUCIAL  [FIDUCIAL-MICRO]  186.94,33.53 0 top
FD59  FIDUCIALUFIDUCIAL  [FIDUCIAL-MICRO]  163.07,57.4 0 bottom
FD60  FIDUCIALUFIDUCIAL  [FIDUCIAL-MICRO]  163.07,57.4 0 top
FD61  FIDUCIALUFIDUCIAL  [FIDUCIAL-MICRO]  212.85,33.53 0 bottom
FD62  FIDUCIALUFIDUCIAL  [FIDUCIAL-MICRO]  212.85,33.53 0 top
FD63  FIDUCIALUFIDUCIAL  [FIDUCIAL-MICRO]  188.98,57.4 0 bottom
FD64  FIDUCIALUFIDUCIAL  [FIDUCIAL-MICRO]  188.98,57.4 0 top
FD65  FIDUCIALUFIDUCIAL  [FIDUCIAL-MICRO]  31.5,59.44 0 bottom
FD66  FIDUCIALUFIDUCIAL  [FIDUCIAL-MICRO]  31.5,59.44 0 top
FD67  FIDUCIALUFIDUCIAL  [FIDUCIAL-MICRO]  7.62,83.31 0 bottom
FD68  FIDUCIALUFIDUCIAL  [FIDUCIAL-MICRO]  7.62,83.31 0 top
FD69  FIDUCIALUFIDUCIAL  [FIDUCIAL-MICRO]  57.4,59.44 0 bottom
FD70  FIDUCIALUFIDUCIAL  [FIDUCIAL-MICRO]  57.4,59.44 0 top
FD71  FIDUCIALUFIDUCIAL  [FIDUCIAL-MICRO]  33.53,83.31 0 bottom
FD72  FIDUCIALUFIDUCIAL  [FIDUCIAL-MICRO]  33.53,83.31 0 top
FD73  FIDUCIALUFIDUCIAL  [FIDUCIAL-MICRO]  83.31,59.44 0 bottom
FD74  FIDUCIALUFIDUCIAL  [FIDUCIAL-MICRO]  83.31,59.44 0 top
FD75  FIDUCIALUFIDUCIAL  [FIDUCIAL-MICRO]  59.44,83.31 0 bottom
FD76  FIDUCIALUFIDUCIAL  [FIDUCIAL-MICRO]  59.44,83.31 0 top
FD77  FIDUCIALUFIDUCIAL  [FIDUCIAL-MICRO]  109.22,59.44 0 bottom
FD78  FIDUCIALUFIDUCIAL  [FIDUCIAL-MICRO]  109.22,59.44 0 top
FD79  FIDUCIALUFIDUCIAL  [FIDUCIAL-MICRO]  85.34,83.31 0 bottom
FD80  FIDUCIALUFIDUCIAL  [FIDUCIAL-MICRO]  85.34,83.31 0 top
FD81  FIDUCIALUFIDUCIAL  [FIDUCIAL-MICRO]  135.13,59.44 0 bottom
FD82  FIDUCIALUFIDUCIAL  [FIDUCIAL-MICRO]  135.13,59.44 0 top
FD83  FIDUCIALUFIDUCIAL  [FIDUCIAL-MICRO]  111.25,83.31 0 bottom
FD84  FIDUCIALUFIDUCIAL  [FIDUCIAL-MICRO]  111.25,83.31 0 top
FD85  FIDUCIALUFIDUCIAL  [FIDUCIAL-MICRO]  161.04,59.44 0 bottom
FD86  FIDUCIALUFIDUCIAL  [FIDUCIAL-MICRO]  161.04,59.44 0 top
FD87  FIDUCIALUFIDUCIAL  [FIDUCIAL-MICRO]  137.16,83.31 0 bottom
FD88  FIDUCIALUFIDUCIAL  [FIDUCIAL-MICRO]  137.16,83.31 0 top
FD89  FIDUCIALUFIDUCIAL  [FIDUCIAL-MICRO]  186.94,59.44 0 bottom
FD90  FIDUCIALUFIDUCIAL  [FIDUCIAL-MICRO]  186.94,59.44 0 top
FD91  FIDUCIALUFIDUCIAL  [FIDUCIAL-MICRO]  163.07,83.31 0 bottom
FD92  FIDUCIALUFIDUCIAL  [FIDUCIAL-MICRO]  163.07,83.31 0 top
FD93  FIDUCIALUFIDUCIAL  [FIDUCIAL-MICRO]  212.85,59.44 0 bottom
FD94  FIDUCIALUFIDUCIAL  [FIDUCIAL-MICRO]  212.85,59.44 0 top
FD95  FIDUCIALUFIDUCIAL  [FIDUCIAL-MICRO]  188.98,83.31 0 bottom
FD96  FIDUCIALUFIDUCIAL  [FIDUCIAL-MICRO]  188.98,83.31 0 top
FD97  FIDUCIALUFIDUCIAL  [FIDUCIAL-MICRO]  31.5,85.34 0 bottom
FD98  FIDUCIALUFIDUCIAL  [FIDUCIAL-MICRO]  31.5,85.34 0 top
FD99  FIDUCIALUFIDUCIAL  [FIDUCIAL-MICRO]  7.62,109.22 0 bottom
FD100  FIDUCIALUFIDUCIAL  [FIDUCIAL-MICRO]  7.62,109.22 0 top
FD101  FIDUCIALUFIDUCIAL  [FIDUCIAL-MICRO]  57.4,85.34 0 bottom
FD102  FIDUCIALUFIDUCIAL  [FIDUCIAL-MICRO]  57.4,85.34 0 top
FD103  FIDUCIALUFIDUCIAL  [FIDUCIAL-MICRO]  33.53,109.22 0 bottom
FD104  FIDUCIALUFIDUCIAL  [FIDUCIAL-MICRO]  33.53,109.22 0 top
FD105  FIDUCIALUFIDUCIAL  [FIDUCIAL-MICRO]  83.31,85.34 0 bottom
FD106  FIDUCIALUFIDUCIAL  [FIDUCIAL-MICRO]  83.31,85.34 0 top
FD107  FIDUCIALUFIDUCIAL  [FIDUCIAL-MICRO]  59.44,109.22 0 bottom
FD108  FIDUCIALUFIDUCIAL  [FIDUCIAL-MICRO]  59.44,109.22 0 top
FD109  FIDUCIALUFIDUCIAL  [FIDUCIAL-MICRO]  109.22,85.34 0 bottom
FD110  FIDUCIALUFIDUCIAL  [FIDUCIAL-MICRO]  109.22,85.34 0 top
FD111  FIDUCIALUFIDUCIAL  [FIDUCIAL-MICRO]  85.34,109.22 0 bottom
FD112  FIDUCIALUFIDUCIAL  [FIDUCIAL-MICRO]  85.34,109.22 0 top
FD113  FIDUCIALUFIDUCIAL  [FIDUCIAL-MICRO]  135.13,85.34 0 bottom
FD114  FIDUCIALUFIDUCIAL  [FIDUCIAL-MICRO]  135.13,85.34 0 top
FD115  FIDUCIALUFIDUCIAL  [FIDUCIAL-MICRO]  111.25,109.22 0 bottom
FD116  FIDUCIALUFIDUCIAL  [FIDUCIAL-MICRO]  111.25,109.22 0 top
FD117  FIDUCIALUFIDUCIAL  [FIDUCIAL-MICRO]  161.04,85.34 0 bottom
FD118  FIDUCIALUFIDUCIAL  [FIDUCIAL-MICRO]  161.04,85.34 0 top
FD119  FIDUCIALUFIDUCIAL  [FIDUCIAL-MICRO]  137.16,109.22 0 bottom
FD120  FIDUCIALUFIDUCIAL  [FIDUCIAL-MICRO]  137.16,109.22 0 top
FD121  FIDUCIALUFIDUCIAL  [FIDUCIAL-MICRO]  186.94,85.34 0 bottom
FD122  FIDUCIALUFIDUCIAL  [FIDUCIAL-MICRO]  186.94,85.34 0 top
FD123  FIDUCIALUFIDUCIAL  [FIDUCIAL-MICRO]  163.07,109.22 0 bottom
FD124  FIDUCIALUFIDUCIAL  [FIDUCIAL-MICRO]  163.07,109.22 0 top
FD125  FIDUCIALUFIDUCIAL  [FIDUCIAL-MICRO]  212.85,85.34 0 bottom
FD126  FIDUCIALUFIDUCIAL  [FIDUCIAL-MICRO]  212.85,85.34 0 top
FD127  FIDUCIALUFIDUCIAL  [FIDUCIAL-MICRO]  188.98,109.22 0 bottom
FD128  FIDUCIALUFIDUCIAL  [FIDUCIAL-MICRO]  188.98,109.22 0 top
FD129  FIDUCIALUFIDUCIAL  [FIDUCIAL-MICRO]  31.5,111.25 0 bottom
FD130  FIDUCIALUFIDUCIAL  [FIDUCIAL-MICRO]  31.5,111.25 0 top
FD131  FIDUCIALUFIDUCIAL  [FIDUCIAL-MICRO]  7.62,135.13 0 bottom
FD132  FIDUCIALUFIDUCIAL  [FIDUCIAL-MICRO]  7.62,135.13 0 top
FD133  FIDUCIALUFIDUCIAL  [FIDUCIAL-MICRO]  57.4,111.25 0 bottom
FD134  FIDUCIALUFIDUCIAL  [FIDUCIAL-MICRO]  57.4,111.25 0 top
FD135  FIDUCIALUFIDUCIAL  [FIDUCIAL-MICRO]  33.53,135.13 0 bottom
FD136  FIDUCIALUFIDUCIAL  [FIDUCIAL-MICRO]  33.53,135.13 0 top
FD137  FIDUCIALUFIDUCIAL  [FIDUCIAL-MICRO]  83.31,111.25 0 bottom
FD138  FIDUCIALUFIDUCIAL  [FIDUCIAL-MICRO]  83.31,111.25 0 top
FD139  FIDUCIALUFIDUCIAL  [FIDUCIAL-MICRO]  59.44,135.13 0 bottom
FD140  FIDUCIALUFIDUCIAL  [FIDUCIAL-MICRO]  59.44,135.13 0 top
FD141  FIDUCIALUFIDUCIAL  [FIDUCIAL-MICRO]  109.22,111.25 0 bottom
FD142  FIDUCIALUFIDUCIAL  [FIDUCIAL-MICRO]  109.22,111.25 0 top
FD143  FIDUCIALUFIDUCIAL  [FIDUCIAL-MICRO]  85.34,135.13 0 bottom
FD144  FIDUCIALUFIDUCIAL  [FIDUCIAL-MICRO]  85.34,135.13 0 top
FD145  FIDUCIALUFIDUCIAL  [FIDUCIAL-MICRO]  135.13,111.25 0 bottom
FD146  FIDUCIALUFIDUCIAL  [FIDUCIAL-MICRO]  135.13,111.25 0 top
FD147  FIDUCIALUFIDUCIAL  [FIDUCIAL-MICRO]  111.25,135.13 0 bottom
FD148  FIDUCIALUFIDUCIAL  [FIDUCIAL-MICRO]  111.25,135.13 0 top
FD149  FIDUCIALUFIDUCIAL  [FIDUCIAL-MICRO]  161.04,111.25 0 bottom
FD150  FIDUCIALUFIDUCIAL  [FIDUCIAL-MICRO]  161.04,111.25 0 top
FD151  FIDUCIALUFIDUCIAL  [FIDUCIAL-MICRO]  137.16,135.13 0 bottom
FD152  FIDUCIALUFIDUCIAL  [FIDUCIAL-MICRO]  137.16,135.13 0 top
FD153  FIDUCIALUFIDUCIAL  [FIDUCIAL-MICRO]  186.94,111.25 0 bottom
FD154  FIDUCIALUFIDUCIAL  [FIDUCIAL-MICRO]  186.94,111.25 0 top
FD155  FIDUCIALUFIDUCIAL  [FIDUCIAL-MICRO]  163.07,135.13 0 bottom
FD156  FIDUCIALUFIDUCIAL  [FIDUCIAL-MICRO]  163.07,135.13 0 top
FD157  FIDUCIALUFIDUCIAL  [FIDUCIAL-MICRO]  212.85,111.25 0 bottom
FD158  FIDUCIALUFIDUCIAL  [FIDUCIAL-MICRO]  212.85,111.25 0 top
FD159  FIDUCIALUFIDUCIAL  [FIDUCIAL-MICRO]  188.98,135.13 0 bottom
FD160  FIDUCIALUFIDUCIAL  [FIDUCIAL-MICRO]  188.98,135.13 0 top
FD161  FIDUCIALUFIDUCIAL  [FIDUCIAL-MICRO]  31.5,137.16 0 bottom
FD162  FIDUCIALUFIDUCIAL  [FIDUCIAL-MICRO]  31.5,137.16 0 top
FD163  FIDUCIALUFIDUCIAL  [FIDUCIAL-MICRO]  7.62,161.04 0 bottom
FD164  FIDUCIALUFIDUCIAL  [FIDUCIAL-MICRO]  7.62,161.04 0 top
FD165  FIDUCIALUFIDUCIAL  [FIDUCIAL-MICRO]  57.4,137.16 0 bottom
FD166  FIDUCIALUFIDUCIAL  [FIDUCIAL-MICRO]  57.4,137.16 0 top
FD167  FIDUCIALUFIDUCIAL  [FIDUCIAL-MICRO]  33.53,161.04 0 bottom
FD168  FIDUCIALUFIDUCIAL  [FIDUCIAL-MICRO]  33.53,161.04 0 top
FD169  FIDUCIALUFIDUCIAL  [FIDUCIAL-MICRO]  83.31,137.16 0 bottom
FD170  FIDUCIALUFIDUCIAL  [FIDUCIAL-MICRO]  83.31,137.16 0 top
FD171  FIDUCIALUFIDUCIAL  [FIDUCIAL-MICRO]  59.44,161.04 0 bottom
FD172  FIDUCIALUFIDUCIAL  [FIDUCIAL-MICRO]  59.44,161.04 0 top
FD173  FIDUCIALUFIDUCIAL  [FIDUCIAL-MICRO]  109.22,137.16 0 bottom
FD174  FIDUCIALUFIDUCIAL  [FIDUCIAL-MICRO]  109.22,137.16 0 top
FD175  FIDUCIALUFIDUCIAL  [FIDUCIAL-MICRO]  85.34,161.04 0 bottom
FD176  FIDUCIALUFIDUCIAL  [FIDUCIAL-MICRO]  85.34,161.04 0 top
FD177  FIDUCIALUFIDUCIAL  [FIDUCIAL-MICRO]  135.13,137.16 0 bottom
FD178  FIDUCIALUFIDUCIAL  [FIDUCIAL-MICRO]  135.13,137.16 0 top
FD179  FIDUCIALUFIDUCIAL  [FIDUCIAL-MICRO]  111.25,161.04 0 bottom
FD180  FIDUCIALUFIDUCIAL  [FIDUCIAL-MICRO]  111.25,161.04 0 top
FD181  FIDUCIALUFIDUCIAL  [FIDUCIAL-MICRO]  161.04,137.16 0 bottom
FD182  FIDUCIALUFIDUCIAL  [FIDUCIAL-MICRO]  161.04,137.16 0 top
FD183  FIDUCIALUFIDUCIAL  [FIDUCIAL-MICRO]  137.16,161.04 0 bottom
FD184  FIDUCIALUFIDUCIAL  [FIDUCIAL-MICRO]  137.16,161.04 0 top
FD185  FIDUCIALUFIDUCIAL  [FIDUCIAL-MICRO]  186.94,137.16 0 bottom
FD186  FIDUCIALUFIDUCIAL  [FIDUCIAL-MICRO]  186.94,137.16 0 top
FD187  FIDUCIALUFIDUCIAL  [FIDUCIAL-MICRO]  163.07,161.04 0 bottom
FD188  FIDUCIALUFIDUCIAL  [FIDUCIAL-MICRO]  163.07,161.04 0 top
FD189  FIDUCIALUFIDUCIAL  [FIDUCIAL-MICRO]  212.85,137.16 0 bottom
FD190  FIDUCIALUFIDUCIAL  [FIDUCIAL-MICRO]  212.85,137.16 0 top
FD191  FIDUCIALUFIDUCIAL  [FIDUCIAL-MICRO]  188.98,161.04 0 bottom
FD192  FIDUCIALUFIDUCIAL  [FIDUCIAL-MICRO]  188.98,161.04 0 top
H1  STAND-OFFTIGHT  [STAND-OFF-TIGHT]  9.4,29.72 0 top
H2  STAND-OFFTIGHT  [STAND-OFF-TIGHT]  9.4,9.4 0 top
H3  STAND-OFFTIGHT  [STAND-OFF-TIGHT]  29.72,29.72 0 top
H4  STAND-OFFTIGHT  [STAND-OFF-TIGHT]  29.72,9.4 0 top
H5  STAND-OFFTIGHT  [STAND-OFF-TIGHT]  35.31,29.72 0 top
H6  STAND-OFFTIGHT  [STAND-OFF-TIGHT]  35.31,9.4 0 top
H7  STAND-OFFTIGHT  [STAND-OFF-TIGHT]  55.63,29.72 0 top
H8  STAND-OFFTIGHT  [STAND-OFF-TIGHT]  55.63,9.4 0 top
H9  STAND-OFFTIGHT  [STAND-OFF-TIGHT]  61.21,29.72 0 top
H10  STAND-OFFTIGHT  [STAND-OFF-TIGHT]  61.21,9.4 0 top
H11  STAND-OFFTIGHT  [STAND-OFF-TIGHT]  81.53,29.72 0 top
H12  STAND-OFFTIGHT  [STAND-OFF-TIGHT]  81.53,9.4 0 top
H13  STAND-OFFTIGHT  [STAND-OFF-TIGHT]  87.12,29.72 0 top
H14  STAND-OFFTIGHT  [STAND-OFF-TIGHT]  87.12,9.4 0 top
H15  STAND-OFFTIGHT  [STAND-OFF-TIGHT]  107.44,29.72 0 top
H16  STAND-OFFTIGHT  [STAND-OFF-TIGHT]  107.44,9.4 0 top
H17  STAND-OFFTIGHT  [STAND-OFF-TIGHT]  113.03,29.72 0 top
H18  STAND-OFFTIGHT  [STAND-OFF-TIGHT]  113.03,9.4 0 top
H19  STAND-OFFTIGHT  [STAND-OFF-TIGHT]  133.35,29.72 0 top
H20  STAND-OFFTIGHT  [STAND-OFF-TIGHT]  133.35,9.4 0 top
H21  STAND-OFFTIGHT  [STAND-OFF-TIGHT]  138.94,29.72 0 top
H22  STAND-OFFTIGHT  [STAND-OFF-TIGHT]  138.94,9.4 0 top
H23  STAND-OFFTIGHT  [STAND-OFF-TIGHT]  159.26,29.72 0 top
H24  STAND-OFFTIGHT  [STAND-OFF-TIGHT]  159.26,9.4 0 top
H25  STAND-OFFTIGHT  [STAND-OFF-TIGHT]  164.85,29.72 0 top
H26  STAND-OFFTIGHT  [STAND-OFF-TIGHT]  164.85,9.4 0 top
H27  STAND-OFFTIGHT  [STAND-OFF-TIGHT]  185.17,29.72 0 top
H28  STAND-OFFTIGHT  [STAND-OFF-TIGHT]  185.17,9.4 0 top
H29  STAND-OFFTIGHT  [STAND-OFF-TIGHT]  190.75,29.72 0 top
H30  STAND-OFFTIGHT  [STAND-OFF-TIGHT]  190.75,9.4 0 top
H31  STAND-OFFTIGHT  [STAND-OFF-TIGHT]  211.07,29.72 0 top
H32  STAND-OFFTIGHT  [STAND-OFF-TIGHT]  211.07,9.4 0 top
H33  STAND-OFFTIGHT  [STAND-OFF-TIGHT]  9.4,55.63 0 top
H34  STAND-OFFTIGHT  [STAND-OFF-TIGHT]  9.4,35.31 0 top
H35  STAND-OFFTIGHT  [STAND-OFF-TIGHT]  29.72,55.63 0 top
H36  STAND-OFFTIGHT  [STAND-OFF-TIGHT]  29.72,35.31 0 top
H37  STAND-OFFTIGHT  [STAND-OFF-TIGHT]  35.31,55.63 0 top
H38  STAND-OFFTIGHT  [STAND-OFF-TIGHT]  35.31,35.31 0 top
H39  STAND-OFFTIGHT  [STAND-OFF-TIGHT]  55.63,55.63 0 top
H40  STAND-OFFTIGHT  [STAND-OFF-TIGHT]  55.63,35.31 0 top
H41  STAND-OFFTIGHT  [STAND-OFF-TIGHT]  61.21,55.63 0 top
H42  STAND-OFFTIGHT  [STAND-OFF-TIGHT]  61.21,35.31 0 top
H43  STAND-OFFTIGHT  [STAND-OFF-TIGHT]  81.53,55.63 0 top
H44  STAND-OFFTIGHT  [STAND-OFF-TIGHT]  81.53,35.31 0 top
H45  STAND-OFFTIGHT  [STAND-OFF-TIGHT]  87.12,55.63 0 top
H46  STAND-OFFTIGHT  [STAND-OFF-TIGHT]  87.12,35.31 0 top
H47  STAND-OFFTIGHT  [STAND-OFF-TIGHT]  107.44,55.63 0 top
H48  STAND-OFFTIGHT  [STAND-OFF-TIGHT]  107.44,35.31 0 top
H49  STAND-OFFTIGHT  [STAND-OFF-TIGHT]  113.03,55.63 0 top
H50  STAND-OFFTIGHT  [STAND-OFF-TIGHT]  113.03,35.31 0 top
H51  STAND-OFFTIGHT  [STAND-OFF-TIGHT]  133.35,55.63 0 top
H52  STAND-OFFTIGHT  [STAND-OFF-TIGHT]  133.35,35.31 0 top
H53  STAND-OFFTIGHT  [STAND-OFF-TIGHT]  138.94,55.63 0 top
H54  STAND-OFFTIGHT  [STAND-OFF-TIGHT]  138.94,35.31 0 top
H55  STAND-OFFTIGHT  [STAND-OFF-TIGHT]  159.26,55.63 0 top
H56  STAND-OFFTIGHT  [STAND-OFF-TIGHT]  159.26,35.31 0 top
H57  STAND-OFFTIGHT  [STAND-OFF-TIGHT]  164.85,55.63 0 top
H58  STAND-OFFTIGHT  [STAND-OFF-TIGHT]  164.85,35.31 0 top
H59  STAND-OFFTIGHT  [STAND-OFF-TIGHT]  185.17,55.63 0 top
H60  STAND-OFFTIGHT  [STAND-OFF-TIGHT]  185.17,35.31 0 top
H61  STAND-OFFTIGHT  [STAND-OFF-TIGHT]  190.75,55.63 0 top
H62  STAND-OFFTIGHT  [STAND-OFF-TIGHT]  190.75,35.31 0 top
H63  STAND-OFFTIGHT  [STAND-OFF-TIGHT]  211.07,55.63 0 top
H64  STAND-OFFTIGHT  [STAND-OFF-TIGHT]  211.07,35.31 0 top
H65  STAND-OFFTIGHT  [STAND-OFF-TIGHT]  9.4,81.53 0 top
H66  STAND-OFFTIGHT  [STAND-OFF-TIGHT]  9.4,61.21 0 top
H67  STAND-OFFTIGHT  [STAND-OFF-TIGHT]  29.72,81.53 0 top
H68  STAND-OFFTIGHT  [STAND-OFF-TIGHT]  29.72,61.21 0 top
H69  STAND-OFFTIGHT  [STAND-OFF-TIGHT]  35.31,81.53 0 top
H70  STAND-OFFTIGHT  [STAND-OFF-TIGHT]  35.31,61.21 0 top
H71  STAND-OFFTIGHT  [STAND-OFF-TIGHT]  55.63,81.53 0 top
H72  STAND-OFFTIGHT  [STAND-OFF-TIGHT]  55.63,61.21 0 top
H73  STAND-OFFTIGHT  [STAND-OFF-TIGHT]  61.21,81.53 0 top
H74  STAND-OFFTIGHT  [STAND-OFF-TIGHT]  61.21,61.21 0 top
H75  STAND-OFFTIGHT  [STAND-OFF-TIGHT]  81.53,81.53 0 top
H76  STAND-OFFTIGHT  [STAND-OFF-TIGHT]  81.53,61.21 0 top
H77  STAND-OFFTIGHT  [STAND-OFF-TIGHT]  87.12,81.53 0 top
H78  STAND-OFFTIGHT  [STAND-OFF-TIGHT]  87.12,61.21 0 top
H79  STAND-OFFTIGHT  [STAND-OFF-TIGHT]  107.44,81.53 0 top
H80  STAND-OFFTIGHT  [STAND-OFF-TIGHT]  107.44,61.21 0 top
H81  STAND-OFFTIGHT  [STAND-OFF-TIGHT]  113.03,81.53 0 top
H82  STAND-OFFTIGHT  [STAND-OFF-TIGHT]  113.03,61.21 0 top
H83  STAND-OFFTIGHT  [STAND-OFF-TIGHT]  133.35,81.53 0 top
H84  STAND-OFFTIGHT  [STAND-OFF-TIGHT]  133.35,61.21 0 top
H85  STAND-OFFTIGHT  [STAND-OFF-TIGHT]  138.94,81.53 0 top
H86  STAND-OFFTIGHT  [STAND-OFF-TIGHT]  138.94,61.21 0 top
H87  STAND-OFFTIGHT  [STAND-OFF-TIGHT]  159.26,81.53 0 top
H88  STAND-OFFTIGHT  [STAND-OFF-TIGHT]  159.26,61.21 0 top
H89  STAND-OFFTIGHT  [STAND-OFF-TIGHT]  164.85,81.53 0 top
H90  STAND-OFFTIGHT  [STAND-OFF-TIGHT]  164.85,61.21 0 top
H91  STAND-OFFTIGHT  [STAND-OFF-TIGHT]  185.17,81.53 0 top
H92  STAND-OFFTIGHT  [STAND-OFF-TIGHT]  185.17,61.21 0 top
H93  STAND-OFFTIGHT  [STAND-OFF-TIGHT]  190.75,81.53 0 top
H94  STAND-OFFTIGHT  [STAND-OFF-TIGHT]  190.75,61.21 0 top
H95  STAND-OFFTIGHT  [STAND-OFF-TIGHT]  211.07,81.53 0 top
H96  STAND-OFFTIGHT  [STAND-OFF-TIGHT]  211.07,61.21 0 top
H97  STAND-OFFTIGHT  [STAND-OFF-TIGHT]  9.4,107.44 0 top
H98  STAND-OFFTIGHT  [STAND-OFF-TIGHT]  9.4,87.12 0 top
H99  STAND-OFFTIGHT  [STAND-OFF-TIGHT]  29.72,107.44 0 top
H100  STAND-OFFTIGHT  [STAND-OFF-TIGHT]  29.72,87.12 0 top
H101  STAND-OFFTIGHT  [STAND-OFF-TIGHT]  35.31,107.44 0 top
H102  STAND-OFFTIGHT  [STAND-OFF-TIGHT]  35.31,87.12 0 top
H103  STAND-OFFTIGHT  [STAND-OFF-TIGHT]  55.63,107.44 0 top
H104  STAND-OFFTIGHT  [STAND-OFF-TIGHT]  55.63,87.12 0 top
H105  STAND-OFFTIGHT  [STAND-OFF-TIGHT]  61.21,107.44 0 top
H106  STAND-OFFTIGHT  [STAND-OFF-TIGHT]  61.21,87.12 0 top
H107  STAND-OFFTIGHT  [STAND-OFF-TIGHT]  81.53,107.44 0 top
H108  STAND-OFFTIGHT  [STAND-OFF-TIGHT]  81.53,87.12 0 top
H109  STAND-OFFTIGHT  [STAND-OFF-TIGHT]  87.12,107.44 0 top
H110  STAND-OFFTIGHT  [STAND-OFF-TIGHT]  87.12,87.12 0 top
H111  STAND-OFFTIGHT  [STAND-OFF-TIGHT]  107.44,107.44 0 top
H112  STAND-OFFTIGHT  [STAND-OFF-TIGHT]  107.44,87.12 0 top
H113  STAND-OFFTIGHT  [STAND-OFF-TIGHT]  113.03,107.44 0 top
H114  STAND-OFFTIGHT  [STAND-OFF-TIGHT]  113.03,87.12 0 top
H115  STAND-OFFTIGHT  [STAND-OFF-TIGHT]  133.35,107.44 0 top
H116  STAND-OFFTIGHT  [STAND-OFF-TIGHT]  133.35,87.12 0 top
H117  STAND-OFFTIGHT  [STAND-OFF-TIGHT]  138.94,107.44 0 top
H118  STAND-OFFTIGHT  [STAND-OFF-TIGHT]  138.94,87.12 0 top
H119  STAND-OFFTIGHT  [STAND-OFF-TIGHT]  159.26,107.44 0 top
H120  STAND-OFFTIGHT  [STAND-OFF-TIGHT]  159.26,87.12 0 top
H121  STAND-OFFTIGHT  [STAND-OFF-TIGHT]  164.85,107.44 0 top
H122  STAND-OFFTIGHT  [STAND-OFF-TIGHT]  164.85,87.12 0 top
H123  STAND-OFFTIGHT  [STAND-OFF-TIGHT]  185.17,107.44 0 top
H124  STAND-OFFTIGHT  [STAND-OFF-TIGHT]  185.17,87.12 0 top
H125  STAND-OFFTIGHT  [STAND-OFF-TIGHT]  190.75,107.44 0 top
H126  STAND-OFFTIGHT  [STAND-OFF-TIGHT]  190.75,87.12 0 top
H127  STAND-OFFTIGHT  [STAND-OFF-TIGHT]  211.07,107.44 0 top
H128  STAND-OFFTIGHT  [STAND-OFF-TIGHT]  211.07,87.12 0 top
H129  STAND-OFFTIGHT  [STAND-OFF-TIGHT]  9.4,133.35 0 top
H130  STAND-OFFTIGHT  [STAND-OFF-TIGHT]  9.4,113.03 0 top
H131  STAND-OFFTIGHT  [STAND-OFF-TIGHT]  29.72,133.35 0 top
H132  STAND-OFFTIGHT  [STAND-OFF-TIGHT]  29.72,113.03 0 top
H133  STAND-OFFTIGHT  [STAND-OFF-TIGHT]  35.31,133.35 0 top
H134  STAND-OFFTIGHT  [STAND-OFF-TIGHT]  35.31,113.03 0 top
H135  STAND-OFFTIGHT  [STAND-OFF-TIGHT]  55.63,133.35 0 top
H136  STAND-OFFTIGHT  [STAND-OFF-TIGHT]  55.63,113.03 0 top
H137  STAND-OFFTIGHT  [STAND-OFF-TIGHT]  61.21,133.35 0 top
H138  STAND-OFFTIGHT  [STAND-OFF-TIGHT]  61.21,113.03 0 top
H139  STAND-OFFTIGHT  [STAND-OFF-TIGHT]  81.53,133.35 0 top
H140  STAND-OFFTIGHT  [STAND-OFF-TIGHT]  81.53,113.03 0 top
H141  STAND-OFFTIGHT  [STAND-OFF-TIGHT]  87.12,133.35 0 top
H142  STAND-OFFTIGHT  [STAND-OFF-TIGHT]  87.12,113.03 0 top
H143  STAND-OFFTIGHT  [STAND-OFF-TIGHT]  107.44,133.35 0 top
H144  STAND-OFFTIGHT  [STAND-OFF-TIGHT]  107.44,113.03 0 top
H145  STAND-OFFTIGHT  [STAND-OFF-TIGHT]  113.03,133.35 0 top
H146  STAND-OFFTIGHT  [STAND-OFF-TIGHT]  113.03,113.03 0 top
H147  STAND-OFFTIGHT  [STAND-OFF-TIGHT]  133.35,133.35 0 top
H148  STAND-OFFTIGHT  [STAND-OFF-TIGHT]  133.35,113.03 0 top
H149  STAND-OFFTIGHT  [STAND-OFF-TIGHT]  138.94,133.35 0 top
H150  STAND-OFFTIGHT  [STAND-OFF-TIGHT]  138.94,113.03 0 top
H151  STAND-OFFTIGHT  [STAND-OFF-TIGHT]  159.26,133.35 0 top
H152  STAND-OFFTIGHT  [STAND-OFF-TIGHT]  159.26,113.03 0 top
H153  STAND-OFFTIGHT  [STAND-OFF-TIGHT]  164.85,133.35 0 top
H154  STAND-OFFTIGHT  [STAND-OFF-TIGHT]  164.85,113.03 0 top
H155  STAND-OFFTIGHT  [STAND-OFF-TIGHT]  185.17,133.35 0 top
H156  STAND-OFFTIGHT  [STAND-OFF-TIGHT]  185.17,113.03 0 top
H157  STAND-OFFTIGHT  [STAND-OFF-TIGHT]  190.75,133.35 0 top
H158  STAND-OFFTIGHT  [STAND-OFF-TIGHT]  190.75,113.03 0 top
H159  STAND-OFFTIGHT  [STAND-OFF-TIGHT]  211.07,133.35 0 top
H160  STAND-OFFTIGHT  [STAND-OFF-TIGHT]  211.07,113.03 0 top
H161  STAND-OFFTIGHT  [STAND-OFF-TIGHT]  9.4,159.26 0 top
H162  STAND-OFFTIGHT  [STAND-OFF-TIGHT]  9.4,138.94 0 top
H163  STAND-OFFTIGHT  [STAND-OFF-TIGHT]  29.72,159.26 0 top
H164  STAND-OFFTIGHT  [STAND-OFF-TIGHT]  29.72,138.94 0 top
H165  STAND-OFFTIGHT  [STAND-OFF-TIGHT]  35.31,159.26 0 top
H166  STAND-OFFTIGHT  [STAND-OFF-TIGHT]  35.31,138.94 0 top
H167  STAND-OFFTIGHT  [STAND-OFF-TIGHT]  55.63,159.26 0 top
H168  STAND-OFFTIGHT  [STAND-OFF-TIGHT]  55.63,138.94 0 top
H169  STAND-OFFTIGHT  [STAND-OFF-TIGHT]  61.21,159.26 0 top
H170  STAND-OFFTIGHT  [STAND-OFF-TIGHT]  61.21,138.94 0 top
H171  STAND-OFFTIGHT  [STAND-OFF-TIGHT]  81.53,159.26 0 top
H172  STAND-OFFTIGHT  [STAND-OFF-TIGHT]  81.53,138.94 0 top
H173  STAND-OFFTIGHT  [STAND-OFF-TIGHT]  87.12,159.26 0 top
H174  STAND-OFFTIGHT  [STAND-OFF-TIGHT]  87.12,138.94 0 top
H175  STAND-OFFTIGHT  [STAND-OFF-TIGHT]  107.44,159.26 0 top
H176  STAND-OFFTIGHT  [STAND-OFF-TIGHT]  107.44,138.94 0 top
H177  STAND-OFFTIGHT  [STAND-OFF-TIGHT]  113.03,159.26 0 top
H178  STAND-OFFTIGHT  [STAND-OFF-TIGHT]  113.03,138.94 0 top
H179  STAND-OFFTIGHT  [STAND-OFF-TIGHT]  133.35,159.26 0 top
H180  STAND-OFFTIGHT  [STAND-OFF-TIGHT]  133.35,138.94 0 top
H181  STAND-OFFTIGHT  [STAND-OFF-TIGHT]  138.94,159.26 0 top
H182  STAND-OFFTIGHT  [STAND-OFF-TIGHT]  138.94,138.94 0 top
H183  STAND-OFFTIGHT  [STAND-OFF-TIGHT]  159.26,159.26 0 top
H184  STAND-OFFTIGHT  [STAND-OFF-TIGHT]  159.26,138.94 0 top
H185  STAND-OFFTIGHT  [STAND-OFF-TIGHT]  164.85,159.26 0 top
H186  STAND-OFFTIGHT  [STAND-OFF-TIGHT]  164.85,138.94 0 top
H187  STAND-OFFTIGHT  [STAND-OFF-TIGHT]  185.17,159.26 0 top
H188  STAND-OFFTIGHT  [STAND-OFF-TIGHT]  185.17,138.94 0 top
H189  STAND-OFFTIGHT  [STAND-OFF-TIGHT]  190.75,159.26 0 top
H190  STAND-OFFTIGHT  [STAND-OFF-TIGHT]  190.75,138.94 0 top
H191  STAND-OFFTIGHT  [STAND-OFF-TIGHT]  211.07,159.26 0 top
H192  STAND-OFFTIGHT  [STAND-OFF-TIGHT]  211.07,138.94 0 top
J1  Screw Terminal  [SCREWTERMINAL-3.5MM-4]  10.54,24.64 270 top
J2  POWER_JACKPOWER_JACK_SLOT_COMBO  [POWER_JACK_PTH_SLOT_BOTH]  20.19,30.86 90 top
J3  Breakout Headers  [1X05_NO_SILK]  30.99,24.64 270 top
J4  Breakout Headers  [1X05_NO_SILK]  56.9,24.64 270 top
J5  Screw Terminal  [SCREWTERMINAL-3.5MM-4]  36.45,24.64 270 top
J6  POWER_JACKPOWER_JACK_SLOT_COMBO  [POWER_JACK_PTH_SLOT_BOTH]  46.1,30.86 90 top
J7  Breakout Headers  [1X05_NO_SILK]  82.8,24.64 270 top
J8  Screw Terminal  [SCREWTERMINAL-3.5MM-4]  62.36,24.64 270 top
J9  POWER_JACKPOWER_JACK_SLOT_COMBO  [POWER_JACK_PTH_SLOT_BOTH]  72.01,30.86 90 top
J10  Breakout Headers  [1X05_NO_SILK]  108.71,24.64 270 top
J11  Screw Terminal  [SCREWTERMINAL-3.5MM-4]  88.27,24.64 270 top
J12  POWER_JACKPOWER_JACK_SLOT_COMBO  [POWER_JACK_PTH_SLOT_BOTH]  97.92,30.86 90 top
J13  Breakout Headers  [1X05_NO_SILK]  134.62,24.64 270 top
J14  Screw Terminal  [SCREWTERMINAL-3.5MM-4]  114.17,24.64 270 top
J15  POWER_JACKPOWER_JACK_SLOT_COMBO  [POWER_JACK_PTH_SLOT_BOTH]  123.83,30.86 90 top
J16  Breakout Headers  [1X05_NO_SILK]  160.53,24.64 270 top
J17  Screw Terminal  [SCREWTERMINAL-3.5MM-4]  140.08,24.64 270 top
J18  POWER_JACKPOWER_JACK_SLOT_COMBO  [POWER_JACK_PTH_SLOT_BOTH]  149.73,30.86 90 top
J19  Breakout Headers  [1X05_NO_SILK]  186.44,24.64 270 top
J20  Screw Terminal  [SCREWTERMINAL-3.5MM-4]  165.99,24.64 270 top
J21  POWER_JACKPOWER_JACK_SLOT_COMBO  [POWER_JACK_PTH_SLOT_BOTH]  175.64,30.86 90 top
J22  Breakout Headers  [1X05_NO_SILK]  212.34,24.64 270 top
J23  Screw Terminal  [SCREWTERMINAL-3.5MM-4]  191.9,24.64 270 top
J24  POWER_JACKPOWER_JACK_SLOT_COMBO  [POWER_JACK_PTH_SLOT_BOTH]  201.55,30.86 90 top
J25  Breakout Headers  [1X05_NO_SILK]  30.99,50.55 270 top
J26  Screw Terminal  [SCREWTERMINAL-3.5MM-4]  10.54,50.55 270 top
J27  POWER_JACKPOWER_JACK_SLOT_COMBO  [POWER_JACK_PTH_SLOT_BOTH]  20.19,56.77 90 top
J28  Breakout Headers  [1X05_NO_SILK]  56.9,50.55 270 top
J29  Screw Terminal  [SCREWTERMINAL-3.5MM-4]  36.45,50.55 270 top
J30  POWER_JACKPOWER_JACK_SLOT_COMBO  [POWER_JACK_PTH_SLOT_BOTH]  46.1,56.77 90 top
J31  Breakout Headers  [1X05_NO_SILK]  82.8,50.55 270 top
J32  Screw Terminal  [SCREWTERMINAL-3.5MM-4]  62.36,50.55 270 top
J33  POWER_JACKPOWER_JACK_SLOT_COMBO  [POWER_JACK_PTH_SLOT_BOTH]  72.01,56.77 90 top
J34  Breakout Headers  [1X05_NO_SILK]  108.71,50.55 270 top
J35  Screw Terminal  [SCREWTERMINAL-3.5MM-4]  88.27,50.55 270 top
J36  POWER_JACKPOWER_JACK_SLOT_COMBO  [POWER_JACK_PTH_SLOT_BOTH]  97.92,56.77 90 top